# Altium PCB PCB_V0.PcbDoc (part 1 of 4)
Units mm, origin at the board's own origin, x right, y up, seen from the top; angles counter-clockwise.
Board outline 107.95 x 48.89 mm, 4 copper layers (Top Layer, Layer 1, Layer 2, Bottom Layer), stack 1.586 mm thick; 377 components, 276 nets, 880 pads, 284 vias.
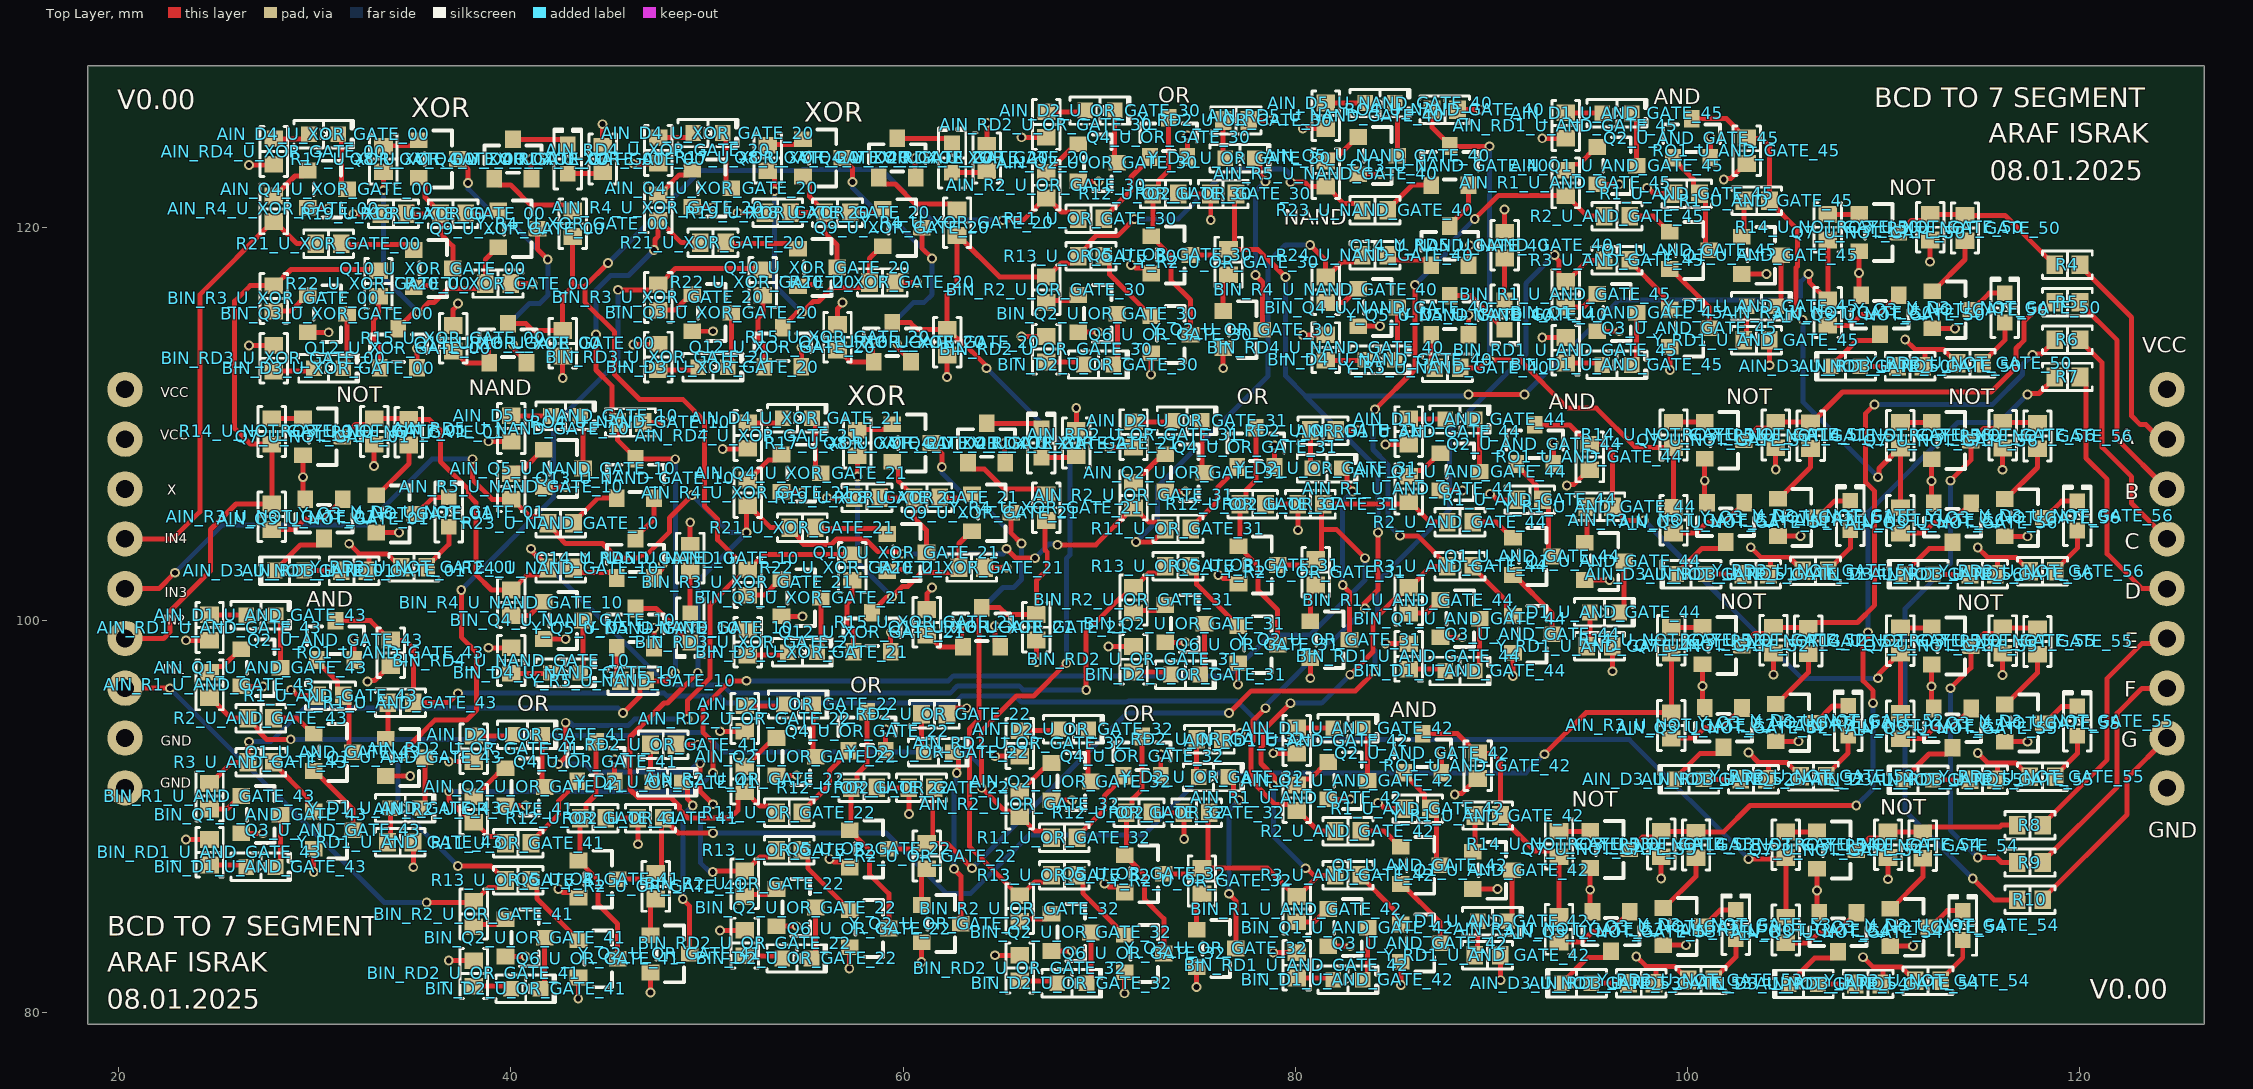
[diagram p0: Top Layer view]
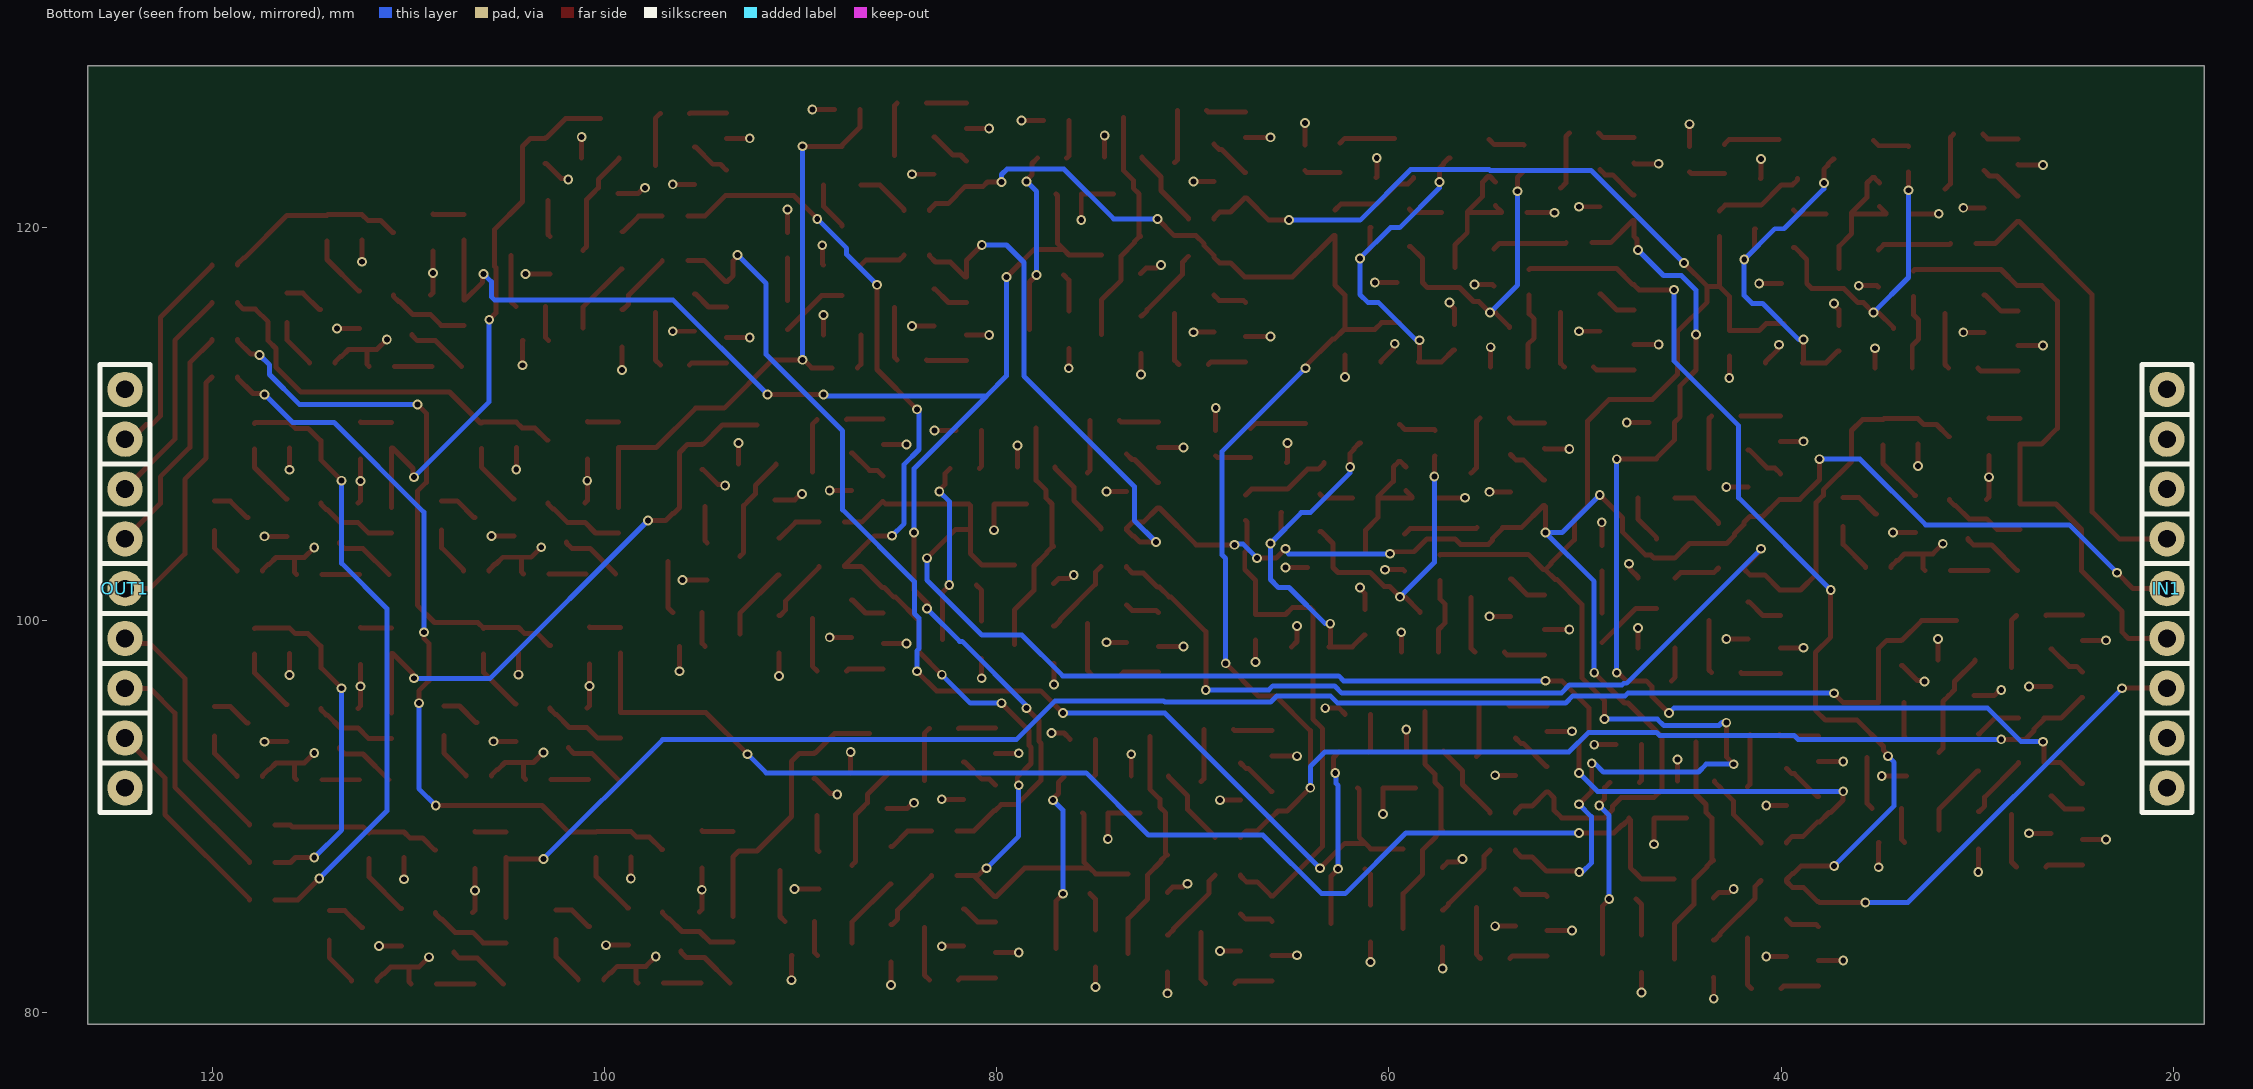
[diagram p1: Bottom Layer view, seen from below]
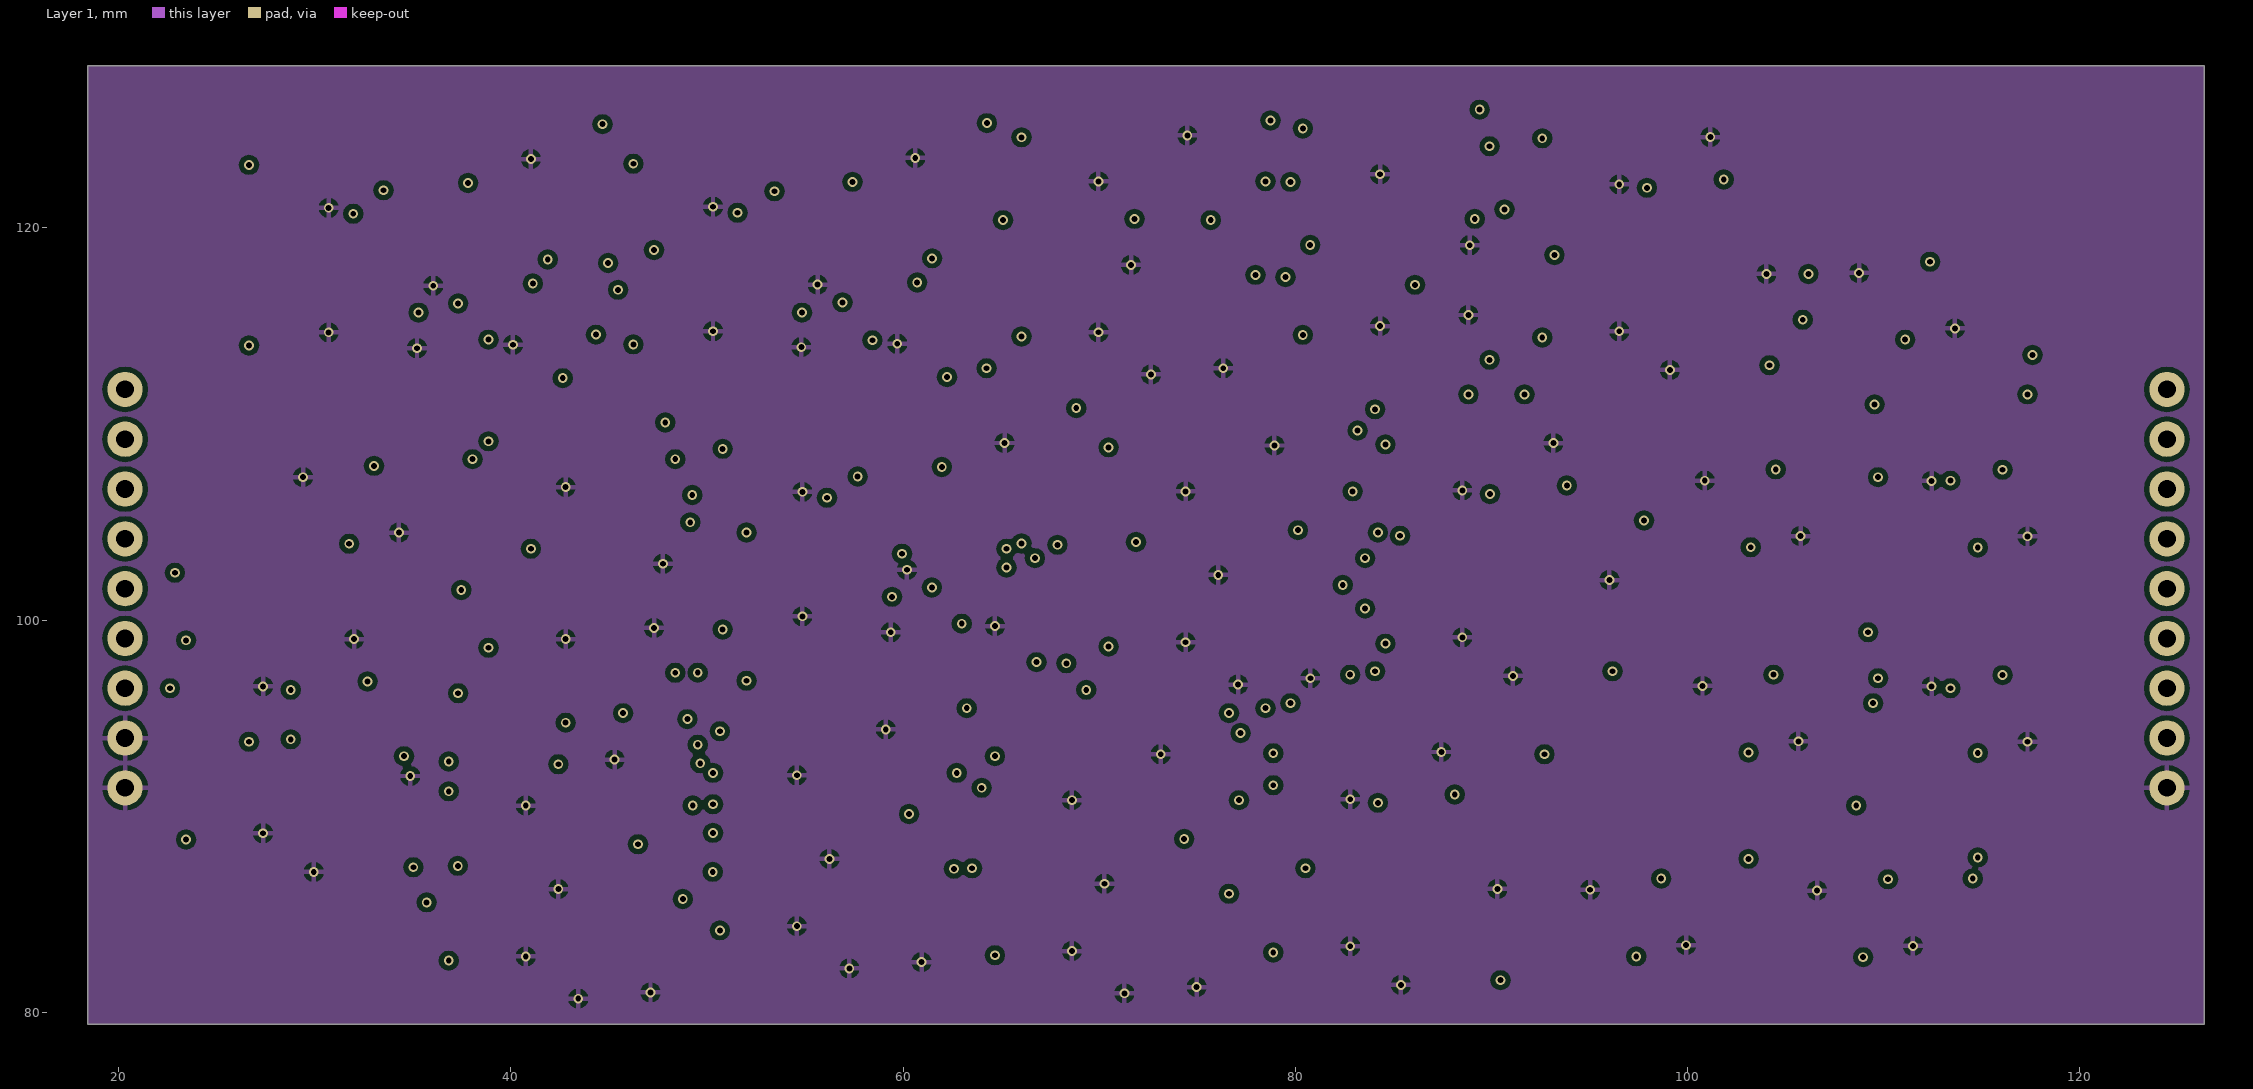
[diagram p2: Layer 1]
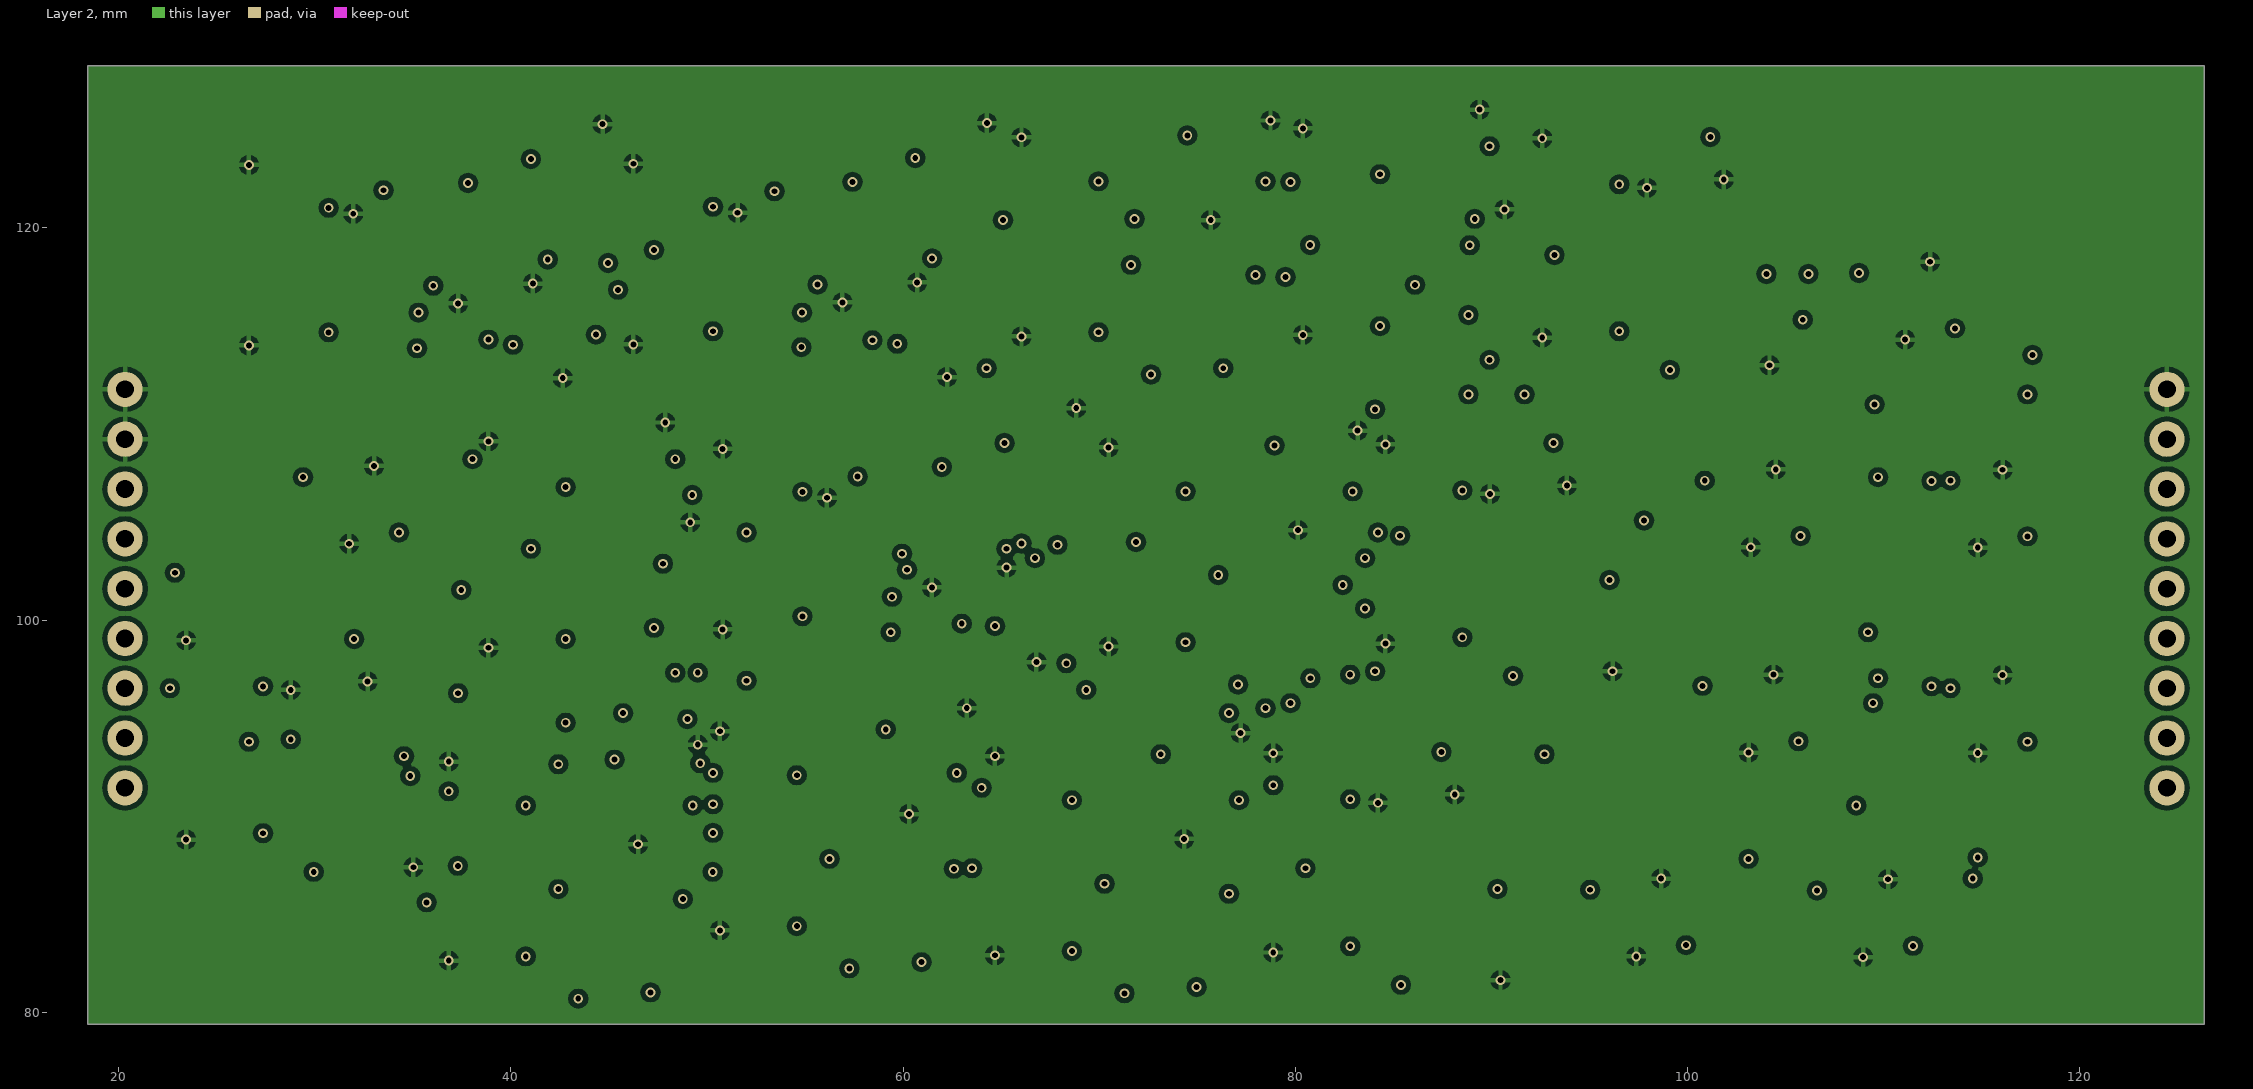
[diagram p3: Layer 2]
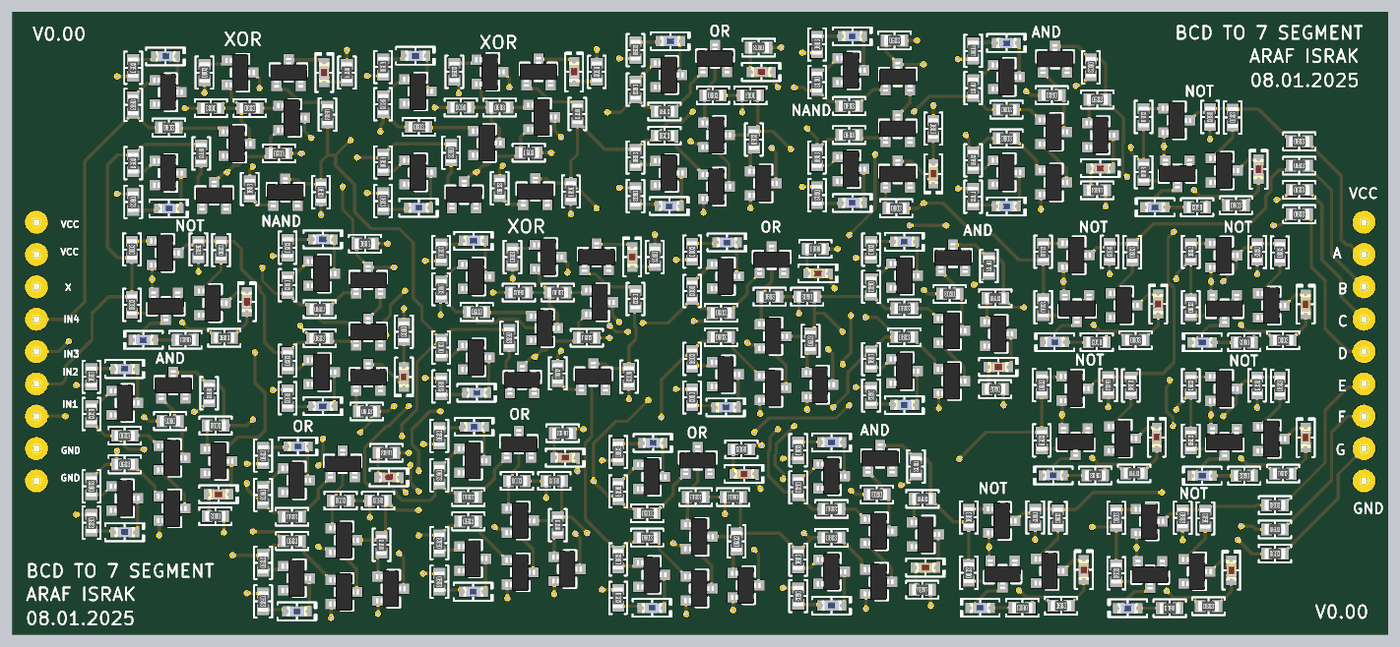
[diagram p7: 3D render of the assembled board from above, using the file's embedded part models]

## Layer stack, top to bottom
Top Solder: solder mask 0.0102, Solder Resist, Dk 3.5
Top Layer: signal copper 0.0356
Dielectric 2: prepreg 0.21, PP-006, Dk 4.1
Layer 1: signal copper 0.015
Dielectric 1: dielectric 1.065, FR-4, Dk 4.8
Layer 2: signal copper 0.015
Dielectric 3: prepreg 0.21, PP-006, Dk 4.1
Bottom Layer: signal copper 0.0356
Bottom Solder: solder mask 0.0102, Solder Resist, Dk 3.5

## Board outline
18.415,79.375 126.365,79.375 126.365,128.27 18.415,128.27

## Design rules (kind name [scope] priority, off if disabled: settings)
Clearance [All] p1: gap=0.254 ignorepadtopadclearanceinfootprint=FALSE except(0: Arc-Hole Track-Hole SMDPad-Hole THPad-Hole Via-Hole Fill-Hole Poly-Hole Region-Hole Text-Hole)
MinimumSolderMaskSliver [All] p1: minsoldermaskwidth=0.15
PolygonConnect [All] p1: connectstyle=Relief reliefconductorwidth=0.254 reliefentries=4 polygonreliefangle="90 Angle" airgapwidth=0.254
RoomDefinition U_XOR_GATE_21 [InComponentClass('U_XOR_GATE_21')] p1: confinementstyle=ConfineIn formatcopy=TRUE lockcomponents=FALSE outline 50.8,97.089 70.104,97.089 70.104,111.567 50.8,111.567
RoomDefinition U_XOR_GATE_20 [InComponentClass('U_XOR_GATE_20')] p2: confinementstyle=ConfineIn formatcopy=TRUE lockcomponents=FALSE outline 46.242,111.628 65.546,111.628 65.546,126.106 46.242,126.106
RoomDefinition U_XOR_GATE_00 [InComponentClass('U_XOR_GATE_00')] p3: confinementstyle=ConfineIn formatcopy=TRUE lockcomponents=FALSE outline 26.64,111.573 45.944,111.573 45.944,126.051 26.64,126.051
RoomDefinition U_OR_GATE_41 [InComponentClass('U_OR_GATE_41')] p4: confinementstyle=ConfineIn formatcopy=TRUE lockcomponents=FALSE outline 36.83,79.925 50.292,79.925 50.292,95.419 36.83,95.419
RoomDefinition U_OR_GATE_32 [InComponentClass('U_OR_GATE_32')] p5: confinementstyle=ConfineIn formatcopy=TRUE lockcomponents=FALSE outline 64.684,80.198 78.146,80.198 78.146,95.692 64.684,95.692
RoomDefinition U_OR_GATE_31 [InComponentClass('U_OR_GATE_31')] p6: confinementstyle=ConfineIn formatcopy=TRUE lockcomponents=FALSE outline 70.484,95.946 83.946,95.946 83.946,111.44 70.484,111.44
RoomDefinition U_OR_GATE_30 [InComponentClass('U_OR_GATE_30')] p7: confinementstyle=ConfineIn formatcopy=TRUE lockcomponents=FALSE outline 66.04,111.76 79.502,111.76 79.502,127.254 66.04,127.254
RoomDefinition U_OR_GATE_22 [InComponentClass('U_OR_GATE_22')] p8: confinementstyle=ConfineIn formatcopy=TRUE lockcomponents=FALSE outline 50.656,81.468 64.118,81.468 64.118,96.962 50.656,96.962
RoomDefinition U_NOT_GATE_56 [InComponentClass('U_NOT_GATE_56')] p9: confinementstyle=ConfineIn formatcopy=TRUE lockcomponents=FALSE outline 109.728,101.153 121.158,101.153 121.158,111.313 109.728,111.313
RoomDefinition U_NOT_GATE_55 [InComponentClass('U_NOT_GATE_55')] p10: confinementstyle=ConfineIn formatcopy=TRUE lockcomponents=FALSE outline 109.728,90.678 121.158,90.678 121.158,100.838 109.728,100.838
RoomDefinition U_NOT_GATE_54 [InComponentClass('U_NOT_GATE_54')] p11: confinementstyle=ConfineIn formatcopy=TRUE lockcomponents=FALSE outline 103.886,80.264 115.316,80.264 115.316,90.424 103.886,90.424
RoomDefinition U_NOT_GATE_53 [InComponentClass('U_NOT_GATE_53')] p12: confinementstyle=ConfineIn formatcopy=TRUE lockcomponents=FALSE outline 92.314,80.302 103.744,80.302 103.744,90.462 92.314,90.462
RoomDefinition U_NOT_GATE_52 [InComponentClass('U_NOT_GATE_52')] p13: confinementstyle=ConfineIn formatcopy=TRUE lockcomponents=FALSE outline 98.044,90.699 109.474,90.699 109.474,100.859 98.044,100.859
RoomDefinition U_NOT_GATE_51 [InComponentClass('U_NOT_GATE_51')] p14: confinementstyle=ConfineIn formatcopy=TRUE lockcomponents=FALSE outline 98.156,101.168 109.586,101.168 109.586,111.328 98.156,111.328
RoomDefinition U_NOT_GATE_50 [InComponentClass('U_NOT_GATE_50')] p15: confinementstyle=ConfineIn formatcopy=TRUE lockcomponents=FALSE outline 106.03,111.76 117.46,111.76 117.46,121.92 106.03,121.92
RoomDefinition U_NOT_GATE_01 [InComponentClass('U_NOT_GATE_01')] p16: confinementstyle=ConfineIn formatcopy=TRUE lockcomponents=FALSE outline 26.67,101.346 38.1,101.346 38.1,111.506 26.67,111.506
RoomDefinition U_NAND_GATE_40 [InComponentClass('U_NAND_GATE_40')] p17: confinementstyle=ConfineIn formatcopy=TRUE lockcomponents=FALSE outline 79.756,111.746 91.948,111.746 91.948,127.494 79.756,127.494
RoomDefinition U_NAND_GATE_10 [InComponentClass('U_NAND_GATE_10')] p18: confinementstyle=ConfineIn formatcopy=TRUE lockcomponents=FALSE outline 38.221,95.788 50.413,95.788 50.413,111.536 38.221,111.536
RoomDefinition U_AND_GATE_45 [InComponentClass('U_AND_GATE_45')] p19: confinementstyle=ConfineIn formatcopy=TRUE lockcomponents=FALSE outline 92.348,111.74 105.81,111.74 105.81,126.98 92.348,126.98
RoomDefinition U_AND_GATE_44 [InComponentClass('U_AND_GATE_44')] p20: confinementstyle=ConfineIn formatcopy=TRUE lockcomponents=FALSE outline 84.344,96.129 97.806,96.129 97.806,111.369 84.344,111.369
RoomDefinition U_AND_GATE_43 [InComponentClass('U_AND_GATE_43')] p21: confinementstyle=ConfineIn formatcopy=TRUE lockcomponents=FALSE outline 23.18,86.136 36.642,86.136 36.642,101.376 23.18,101.376
RoomDefinition U_AND_GATE_42 [InComponentClass('U_AND_GATE_42')] p22: confinementstyle=ConfineIn formatcopy=TRUE lockcomponents=FALSE outline 78.628,80.375 92.09,80.375 92.09,95.615 78.628,95.615
RoutingVias [All] p1: holewidth=0.3 width=0.5 viastyle="Through Hole" minholewidth=0.3 minwidth=0.5 maxholewidth=0.3 maxwidth=0.5
SilkToSilkClearance [All] p1: silktosilkclearance=0.05
SilkToSolderMaskClearance [IsPad] p1: minsilkscreentomaskgap=0.1 clearancetoexposedcopper=TRUE
SolderMaskExpansion [All] p1: expansion=0.05
Width [All] p1: maxlimit=0.254 minlimit=0.254 preferedwidth=0.254
27 further rules are at their usual default settings.

## Classes and differential pairs
channel class XOR_GATE: U_XOR_GATE_00 U_XOR_GATE_20 U_XOR_GATE_21
channel class OR_GATE: U_OR_GATE_22 U_OR_GATE_30 U_OR_GATE_31 U_OR_GATE_32 U_OR_GATE_41
channel class NOT_GATE: U_NOT_GATE_01 U_NOT_GATE_50 U_NOT_GATE_51 U_NOT_GATE_52 U_NOT_GATE_53 U_NOT_GATE_54 U_NOT_GATE_55 U_NOT_GATE_56
channel class NAND_GATE: U_NAND_GATE_10 U_NAND_GATE_40
channel class AND_GATE: U_AND_GATE_42 U_AND_GATE_43 U_AND_GATE_44 U_AND_GATE_45
component class U_XOR_GATE_21: AIN_D4_U_XOR_GATE_21 AIN_Q4_U_XOR_GATE_21 AIN_R4_U_XOR_GATE_21 AIN_RD4_U_XOR_GATE_21 BIN_D3_U_XOR_GATE_21 BIN_Q3_U_XOR_GATE_21 BIN_R3_U_XOR_GATE_21 BIN_RD3_U_XOR_GATE_21 Q8_U_XOR_GATE_21 Q9_U_XOR_GATE_21 Q10_U_XOR_GATE_21 Q11_U_XOR_GATE_21 Q12_U_XOR_GATE_21 R15_U_XOR_GATE_21 R16_U_XOR_GATE_21 R17_U_XOR_GATE_21 R18_U_XOR_GATE_21 R19_U_XOR_GATE_21 R20_U_XOR_GATE_21 R21_U_XOR_GATE_21 R22_U_XOR_GATE_21 Y_D4_U_XOR_GATE_21 Y_Q4_U_XOR_GATE_21 Y_R4_U_XOR_GATE_21 Y_RD4_U_XOR_GATE_21
component class U_XOR_GATE_20: AIN_D4_U_XOR_GATE_20 AIN_Q4_U_XOR_GATE_20 AIN_R4_U_XOR_GATE_20 AIN_RD4_U_XOR_GATE_20 BIN_D3_U_XOR_GATE_20 BIN_Q3_U_XOR_GATE_20 BIN_R3_U_XOR_GATE_20 BIN_RD3_U_XOR_GATE_20 Q8_U_XOR_GATE_20 Q9_U_XOR_GATE_20 Q10_U_XOR_GATE_20 Q11_U_XOR_GATE_20 Q12_U_XOR_GATE_20 R15_U_XOR_GATE_20 R16_U_XOR_GATE_20 R17_U_XOR_GATE_20 R18_U_XOR_GATE_20 R19_U_XOR_GATE_20 R20_U_XOR_GATE_20 R21_U_XOR_GATE_20 R22_U_XOR_GATE_20 Y_D4_U_XOR_GATE_20 Y_Q4_U_XOR_GATE_20 Y_R4_U_XOR_GATE_20 Y_RD4_U_XOR_GATE_20
component class U_XOR_GATE_00: AIN_D4_U_XOR_GATE_00 AIN_Q4_U_XOR_GATE_00 AIN_R4_U_XOR_GATE_00 AIN_RD4_U_XOR_GATE_00 BIN_D3_U_XOR_GATE_00 BIN_Q3_U_XOR_GATE_00 BIN_R3_U_XOR_GATE_00 BIN_RD3_U_XOR_GATE_00 Q8_U_XOR_GATE_00 Q9_U_XOR_GATE_00 Q10_U_XOR_GATE_00 Q11_U_XOR_GATE_00 Q12_U_XOR_GATE_00 R15_U_XOR_GATE_00 R16_U_XOR_GATE_00 R17_U_XOR_GATE_00 R18_U_XOR_GATE_00 R19_U_XOR_GATE_00 R20_U_XOR_GATE_00 R21_U_XOR_GATE_00 R22_U_XOR_GATE_00 Y_D4_U_XOR_GATE_00 Y_Q4_U_XOR_GATE_00 Y_R4_U_XOR_GATE_00 Y_RD4_U_XOR_GATE_00
component class U_OR_GATE_41: AIN_D2_U_OR_GATE_41 AIN_Q2_U_OR_GATE_41 AIN_R2_U_OR_GATE_41 AIN_RD2_U_OR_GATE_41 BIN_D2_U_OR_GATE_41 BIN_Q2_U_OR_GATE_41 BIN_R2_U_OR_GATE_41 BIN_RD2_U_OR_GATE_41 Q4_U_OR_GATE_41 Q5_U_OR_GATE_41 Q6_U_OR_GATE_41 R11_U_OR_GATE_41 R12_U_OR_GATE_41 R13_U_OR_GATE_41 RO2_U_OR_GATE_41 Y_D2_U_OR_GATE_41 Y_Q2_U_OR_GATE_41 Y_R2_U_OR_GATE_41 Y_RD2_U_OR_GATE_41
component class U_OR_GATE_32: AIN_D2_U_OR_GATE_32 AIN_Q2_U_OR_GATE_32 AIN_R2_U_OR_GATE_32 AIN_RD2_U_OR_GATE_32 BIN_D2_U_OR_GATE_32 BIN_Q2_U_OR_GATE_32 BIN_R2_U_OR_GATE_32 BIN_RD2_U_OR_GATE_32 Q4_U_OR_GATE_32 Q5_U_OR_GATE_32 Q6_U_OR_GATE_32 R11_U_OR_GATE_32 R12_U_OR_GATE_32 R13_U_OR_GATE_32 RO2_U_OR_GATE_32 Y_D2_U_OR_GATE_32 Y_Q2_U_OR_GATE_32 Y_R2_U_OR_GATE_32 Y_RD2_U_OR_GATE_32
component class U_OR_GATE_31: AIN_D2_U_OR_GATE_31 AIN_Q2_U_OR_GATE_31 AIN_R2_U_OR_GATE_31 AIN_RD2_U_OR_GATE_31 BIN_D2_U_OR_GATE_31 BIN_Q2_U_OR_GATE_31 BIN_R2_U_OR_GATE_31 BIN_RD2_U_OR_GATE_31 Q4_U_OR_GATE_31 Q5_U_OR_GATE_31 Q6_U_OR_GATE_31 R11_U_OR_GATE_31 R12_U_OR_GATE_31 R13_U_OR_GATE_31 RO2_U_OR_GATE_31 Y_D2_U_OR_GATE_31 Y_Q2_U_OR_GATE_31 Y_R2_U_OR_GATE_31 Y_RD2_U_OR_GATE_31
component class U_OR_GATE_30: AIN_D2_U_OR_GATE_30 AIN_Q2_U_OR_GATE_30 AIN_R2_U_OR_GATE_30 AIN_RD2_U_OR_GATE_30 BIN_D2_U_OR_GATE_30 BIN_Q2_U_OR_GATE_30 BIN_R2_U_OR_GATE_30 BIN_RD2_U_OR_GATE_30 Q4_U_OR_GATE_30 Q5_U_OR_GATE_30 Q6_U_OR_GATE_30 R11_U_OR_GATE_30 R12_U_OR_GATE_30 R13_U_OR_GATE_30 RO2_U_OR_GATE_30 Y_D2_U_OR_GATE_30 Y_Q2_U_OR_GATE_30 Y_R2_U_OR_GATE_30 Y_RD2_U_OR_GATE_30
component class U_OR_GATE_22: AIN_D2_U_OR_GATE_22 AIN_Q2_U_OR_GATE_22 AIN_R2_U_OR_GATE_22 AIN_RD2_U_OR_GATE_22 BIN_D2_U_OR_GATE_22 BIN_Q2_U_OR_GATE_22 BIN_R2_U_OR_GATE_22 BIN_RD2_U_OR_GATE_22 Q4_U_OR_GATE_22 Q5_U_OR_GATE_22 Q6_U_OR_GATE_22 R11_U_OR_GATE_22 R12_U_OR_GATE_22 R13_U_OR_GATE_22 RO2_U_OR_GATE_22 Y_D2_U_OR_GATE_22 Y_Q2_U_OR_GATE_22 Y_R2_U_OR_GATE_22 Y_RD2_U_OR_GATE_22
component class U_NOT_GATE_56: AIN_D3_U_NOT_GATE_56 AIN_Q3_U_NOT_GATE_56 AIN_R3_U_NOT_GATE_56 AIN_RD3_U_NOT_GATE_56 Q7_U_NOT_GATE_56 R14_U_NOT_GATE_56 RO3_U_NOT_GATE_56 Y_D3_U_NOT_GATE_56 Y_Q3_U_NOT_GATE_56 Y_R3_U_NOT_GATE_56 Y_RD3_U_NOT_GATE_56
component class U_NOT_GATE_55: AIN_D3_U_NOT_GATE_55 AIN_Q3_U_NOT_GATE_55 AIN_R3_U_NOT_GATE_55 AIN_RD3_U_NOT_GATE_55 Q7_U_NOT_GATE_55 R14_U_NOT_GATE_55 RO3_U_NOT_GATE_55 Y_D3_U_NOT_GATE_55 Y_Q3_U_NOT_GATE_55 Y_R3_U_NOT_GATE_55 Y_RD3_U_NOT_GATE_55
component class U_NOT_GATE_54: AIN_D3_U_NOT_GATE_54 AIN_Q3_U_NOT_GATE_54 AIN_R3_U_NOT_GATE_54 AIN_RD3_U_NOT_GATE_54 Q7_U_NOT_GATE_54 R14_U_NOT_GATE_54 RO3_U_NOT_GATE_54 Y_D3_U_NOT_GATE_54 Y_Q3_U_NOT_GATE_54 Y_R3_U_NOT_GATE_54 Y_RD3_U_NOT_GATE_54
component class U_NOT_GATE_53: AIN_D3_U_NOT_GATE_53 AIN_Q3_U_NOT_GATE_53 AIN_R3_U_NOT_GATE_53 AIN_RD3_U_NOT_GATE_53 Q7_U_NOT_GATE_53 R14_U_NOT_GATE_53 RO3_U_NOT_GATE_53 Y_D3_U_NOT_GATE_53 Y_Q3_U_NOT_GATE_53 Y_R3_U_NOT_GATE_53 Y_RD3_U_NOT_GATE_53
component class U_NOT_GATE_52: AIN_D3_U_NOT_GATE_52 AIN_Q3_U_NOT_GATE_52 AIN_R3_U_NOT_GATE_52 AIN_RD3_U_NOT_GATE_52 Q7_U_NOT_GATE_52 R14_U_NOT_GATE_52 RO3_U_NOT_GATE_52 Y_D3_U_NOT_GATE_52 Y_Q3_U_NOT_GATE_52 Y_R3_U_NOT_GATE_52 Y_RD3_U_NOT_GATE_52
component class U_NOT_GATE_51: AIN_D3_U_NOT_GATE_51 AIN_Q3_U_NOT_GATE_51 AIN_R3_U_NOT_GATE_51 AIN_RD3_U_NOT_GATE_51 Q7_U_NOT_GATE_51 R14_U_NOT_GATE_51 RO3_U_NOT_GATE_51 Y_D3_U_NOT_GATE_51 Y_Q3_U_NOT_GATE_51 Y_R3_U_NOT_GATE_51 Y_RD3_U_NOT_GATE_51
component class U_NOT_GATE_50: AIN_D3_U_NOT_GATE_50 AIN_Q3_U_NOT_GATE_50 AIN_R3_U_NOT_GATE_50 AIN_RD3_U_NOT_GATE_50 Q7_U_NOT_GATE_50 R14_U_NOT_GATE_50 RO3_U_NOT_GATE_50 Y_D3_U_NOT_GATE_50 Y_Q3_U_NOT_GATE_50 Y_R3_U_NOT_GATE_50 Y_RD3_U_NOT_GATE_50
component class U_NOT_GATE_01: AIN_D3_U_NOT_GATE_01 AIN_Q3_U_NOT_GATE_01 AIN_R3_U_NOT_GATE_01 AIN_RD3_U_NOT_GATE_01 Q7_U_NOT_GATE_01 R14_U_NOT_GATE_01 RO3_U_NOT_GATE_01 Y_D3_U_NOT_GATE_01 Y_Q3_U_NOT_GATE_01 Y_R3_U_NOT_GATE_01 Y_RD3_U_NOT_GATE_01
component class U_NAND_GATE_40: AIN_D5_U_NAND_GATE_40 AIN_Q5_U_NAND_GATE_40 AIN_R5_U_NAND_GATE_40 AIN_RD5_U_NAND_GATE_40 BIN_D4_U_NAND_GATE_40 BIN_Q4_U_NAND_GATE_40 BIN_R4_U_NAND_GATE_40 BIN_RD4_U_NAND_GATE_40 Q13_U_NAND_GATE_40 Q14_U_NAND_GATE_40 R23_U_NAND_GATE_40 R24_U_NAND_GATE_40 RO4_U_NAND_GATE_40 Y_D5_U_NAND_GATE_40 Y_Q5_U_NAND_GATE_40 Y_R5_U_NAND_GATE_40 Y_RD5_U_NAND_GATE_40
component class U_NAND_GATE_10: AIN_D5_U_NAND_GATE_10 AIN_Q5_U_NAND_GATE_10 AIN_R5_U_NAND_GATE_10 AIN_RD5_U_NAND_GATE_10 BIN_D4_U_NAND_GATE_10 BIN_Q4_U_NAND_GATE_10 BIN_R4_U_NAND_GATE_10 BIN_RD4_U_NAND_GATE_10 Q13_U_NAND_GATE_10 Q14_U_NAND_GATE_10 R23_U_NAND_GATE_10 R24_U_NAND_GATE_10 RO4_U_NAND_GATE_10 Y_D5_U_NAND_GATE_10 Y_Q5_U_NAND_GATE_10 Y_R5_U_NAND_GATE_10 Y_RD5_U_NAND_GATE_10
component class U_AND_GATE_45: AIN_D1_U_AND_GATE_45 AIN_Q1_U_AND_GATE_45 AIN_R1_U_AND_GATE_45 AIN_RD1_U_AND_GATE_45 BIN_D1_U_AND_GATE_45 BIN_Q1_U_AND_GATE_45 BIN_R1_U_AND_GATE_45 BIN_RD1_U_AND_GATE_45 Q1_U_AND_GATE_45 Q2_U_AND_GATE_45 Q3_U_AND_GATE_45 R1_U_AND_GATE_45 R2_U_AND_GATE_45 R3_U_AND_GATE_45 RO1_U_AND_GATE_45 Y_D1_U_AND_GATE_45 Y_Q1_U_AND_GATE_45 Y_R1_U_AND_GATE_45 Y_RD1_U_AND_GATE_45
component class U_AND_GATE_44: AIN_D1_U_AND_GATE_44 AIN_Q1_U_AND_GATE_44 AIN_R1_U_AND_GATE_44 AIN_RD1_U_AND_GATE_44 BIN_D1_U_AND_GATE_44 BIN_Q1_U_AND_GATE_44 BIN_R1_U_AND_GATE_44 BIN_RD1_U_AND_GATE_44 Q1_U_AND_GATE_44 Q2_U_AND_GATE_44 Q3_U_AND_GATE_44 R1_U_AND_GATE_44 R2_U_AND_GATE_44 R3_U_AND_GATE_44 RO1_U_AND_GATE_44 Y_D1_U_AND_GATE_44 Y_Q1_U_AND_GATE_44 Y_R1_U_AND_GATE_44 Y_RD1_U_AND_GATE_44
component class U_AND_GATE_43: AIN_D1_U_AND_GATE_43 AIN_Q1_U_AND_GATE_43 AIN_R1_U_AND_GATE_43 AIN_RD1_U_AND_GATE_43 BIN_D1_U_AND_GATE_43 BIN_Q1_U_AND_GATE_43 BIN_R1_U_AND_GATE_43 BIN_RD1_U_AND_GATE_43 Q1_U_AND_GATE_43 Q2_U_AND_GATE_43 Q3_U_AND_GATE_43 R1_U_AND_GATE_43 R2_U_AND_GATE_43 R3_U_AND_GATE_43 RO1_U_AND_GATE_43 Y_D1_U_AND_GATE_43 Y_Q1_U_AND_GATE_43 Y_R1_U_AND_GATE_43 Y_RD1_U_AND_GATE_43
component class U_AND_GATE_42: AIN_D1_U_AND_GATE_42 AIN_Q1_U_AND_GATE_42 AIN_R1_U_AND_GATE_42 AIN_RD1_U_AND_GATE_42 BIN_D1_U_AND_GATE_42 BIN_Q1_U_AND_GATE_42 BIN_R1_U_AND_GATE_42 BIN_RD1_U_AND_GATE_42 Q1_U_AND_GATE_42 Q2_U_AND_GATE_42 Q3_U_AND_GATE_42 R1_U_AND_GATE_42 R2_U_AND_GATE_42 R3_U_AND_GATE_42 RO1_U_AND_GATE_42 Y_D1_U_AND_GATE_42 Y_Q1_U_AND_GATE_42 Y_R1_U_AND_GATE_42 Y_RD1_U_AND_GATE_42
component class MODULE_1: IN1 OUT1 R4 R5 R6 R7 R8 R9 R10

## Components (designator, comment, footprint, x,y, rotation, side; value= is the part's Value field where it differs from the comment)
AIN_D1_U_AND_GATE_42 "Blue" "LED 0603_1608 BLUE" 82.692,94.472 r0 top (schematic designator AIN_D1)
AIN_D1_U_AND_GATE_43 "Blue" "LED 0603_1608 BLUE" 27.244,100.233 r0 top (schematic designator AIN_D1)
AIN_D1_U_AND_GATE_44 "Blue" "LED 0603_1608 BLUE" 88.408,110.226 r0 top (schematic designator AIN_D1)
AIN_D1_U_AND_GATE_45 "Blue" "LED 0603_1608 BLUE" 96.412,125.837 r0 top (schematic designator AIN_D1)
AIN_D2_U_OR_GATE_22 "Blue" "LED 0603_1608 BLUE" 54.661,95.692 r0 top (schematic designator AIN_D2)
AIN_D2_U_OR_GATE_30 "Blue" "LED 0603_1608 BLUE" 70.045,125.984 r0 top (schematic designator AIN_D2)
AIN_D2_U_OR_GATE_31 "Blue" "LED 0603_1608 BLUE" 74.489,110.17 r0 top (schematic designator AIN_D2)
AIN_D2_U_OR_GATE_32 "Blue" "LED 0603_1608 BLUE" 68.689,94.422 r0 top (schematic designator AIN_D2)
AIN_D2_U_OR_GATE_41 "Blue" "LED 0603_1608 BLUE" 40.835,94.149 r0 top (schematic designator AIN_D2)
AIN_D3_U_NOT_GATE_01 "Blue" "LED 0603_1608 BLUE" 28.702,102.52 r180 top (schematic designator AIN_D3)
AIN_D3_U_NOT_GATE_50 "Blue" "LED 0603_1608 BLUE" 108.062,112.934 r180 top (schematic designator AIN_D3)
AIN_D3_U_NOT_GATE_51 "Blue" "LED 0603_1608 BLUE" 100.188,102.342 r180 top (schematic designator AIN_D3)
AIN_D3_U_NOT_GATE_52 "Blue" "LED 0603_1608 BLUE" 100.076,91.873 r180 top (schematic designator AIN_D3)
AIN_D3_U_NOT_GATE_53 "Blue" "LED 0603_1608 BLUE" 94.346,81.476 r180 top (schematic designator AIN_D3)
AIN_D3_U_NOT_GATE_54 "Blue" "LED 0603_1608 BLUE" 105.918,81.438 r180 top (schematic designator AIN_D3)
AIN_D3_U_NOT_GATE_55 "Blue" "LED 0603_1608 BLUE" 111.76,91.852 r180 top (schematic designator AIN_D3)
AIN_D3_U_NOT_GATE_56 "Blue" "LED 0603_1608 BLUE" 111.76,102.327 r180 top (schematic designator AIN_D3)
AIN_D4_U_XOR_GATE_00 "Blue" "LED 0603_1608 BLUE" 30.45,124.781 r0 top (schematic designator AIN_D4)
AIN_D4_U_XOR_GATE_20 "Blue" "LED 0603_1608 BLUE" 50.052,124.836 r0 top (schematic designator AIN_D4)
AIN_D4_U_XOR_GATE_21 "Blue" "LED 0603_1608 BLUE" 54.61,110.297 r0 top (schematic designator AIN_D4)
AIN_D5_U_NAND_GATE_10 "Blue" "LED 0603_1608 BLUE" 42.793,110.408 r0 top (schematic designator AIN_D5)
AIN_D5_U_NAND_GATE_40 "Blue" "LED 0603_1608 BLUE" 84.328,126.366 r0 top (schematic designator AIN_D5)
AIN_Q1_U_AND_GATE_42 "#NAME?" "MCCSEMI SOT-23-3" 82.692,91.805 r0 top (schematic designator AIN_Q1)
AIN_Q1_U_AND_GATE_43 "#NAME?" "MCCSEMI SOT-23-3" 27.244,97.566 r0 top (schematic designator AIN_Q1)
AIN_Q1_U_AND_GATE_44 "#NAME?" "MCCSEMI SOT-23-3" 88.408,107.559 r0 top (schematic designator AIN_Q1)
AIN_Q1_U_AND_GATE_45 "#NAME?" "MCCSEMI SOT-23-3" 96.412,123.17 r0 top (schematic designator AIN_Q1)
AIN_Q2_U_OR_GATE_22 "#NAME?" "MCCSEMI SOT-23-3" 54.546,93.03 r0 top (schematic designator AIN_Q2)
AIN_Q2_U_OR_GATE_30 "#NAME?" "MCCSEMI SOT-23-3" 69.93,123.322 r0 top (schematic designator AIN_Q2)
AIN_Q2_U_OR_GATE_31 "#NAME?" "MCCSEMI SOT-23-3" 74.374,107.508 r0 top (schematic designator AIN_Q2)
AIN_Q2_U_OR_GATE_32 "#NAME?" "MCCSEMI SOT-23-3" 68.574,91.76 r0 top (schematic designator AIN_Q2)
AIN_Q2_U_OR_GATE_41 "#NAME?" "MCCSEMI SOT-23-3" 40.72,91.487 r0 top (schematic designator AIN_Q2)
AIN_Q3_U_NOT_GATE_01 "#NAME?" "MCCSEMI SOT-23-3" 30.465,105.156 r270 top (schematic designator AIN_Q3)
AIN_Q3_U_NOT_GATE_50 "#NAME?" "MCCSEMI SOT-23-3" 109.825,115.57 r270 top (schematic designator AIN_Q3)
AIN_Q3_U_NOT_GATE_51 "#NAME?" "MCCSEMI SOT-23-3" 101.951,104.978 r270 top (schematic designator AIN_Q3)
AIN_Q3_U_NOT_GATE_52 "#NAME?" "MCCSEMI SOT-23-3" 101.839,94.509 r270 top (schematic designator AIN_Q3)
AIN_Q3_U_NOT_GATE_53 "#NAME?" "MCCSEMI SOT-23-3" 96.109,84.112 r270 top (schematic designator AIN_Q3)
AIN_Q3_U_NOT_GATE_54 "#NAME?" "MCCSEMI SOT-23-3" 107.681,84.074 r270 top (schematic designator AIN_Q3)
AIN_Q3_U_NOT_GATE_55 "#NAME?" "MCCSEMI SOT-23-3" 113.523,94.488 r270 top (schematic designator AIN_Q3)
AIN_Q3_U_NOT_GATE_56 "#NAME?" "MCCSEMI SOT-23-3" 113.523,104.963 r270 top (schematic designator AIN_Q3)
AIN_Q4_U_XOR_GATE_00 "#NAME?" "MCCSEMI SOT-23-3" 30.643,121.972 r0 top (schematic designator AIN_Q4)
AIN_Q4_U_XOR_GATE_20 "#NAME?" "MCCSEMI SOT-23-3" 50.245,122.027 r0 top (schematic designator AIN_Q4)
AIN_Q4_U_XOR_GATE_21 "#NAME?" "MCCSEMI SOT-23-3" 54.803,107.488 r0 top (schematic designator AIN_Q4)
AIN_Q5_U_NAND_GATE_10 "#NAME?" "MCCSEMI SOT-23-3" 42.678,107.726 r0 top (schematic designator AIN_Q5)
AIN_Q5_U_NAND_GATE_40 "#NAME?" "MCCSEMI SOT-23-3" 84.213,123.684 r0 top (schematic designator AIN_Q5)
AIN_R1_U_AND_GATE_42 "1 kOhms" "RES 0603_1608" 80.075,90.931 r270 top (schematic designator AIN_R1)
AIN_R1_U_AND_GATE_43 "1 kOhms" "RES 0603_1608" 24.627,96.692 r270 top (schematic designator AIN_R1)
AIN_R1_U_AND_GATE_44 "1 kOhms" "RES 0603_1608" 85.791,106.685 r270 top (schematic designator AIN_R1)
AIN_R1_U_AND_GATE_45 "1 kOhms" "RES 0603_1608" 93.795,122.296 r270 top (schematic designator AIN_R1)
AIN_R2_U_OR_GATE_22 "1 kOhms" "RES 0603_1608" 51.926,91.882 r270 top (schematic designator AIN_R2)
AIN_R2_U_OR_GATE_30 "1 kOhms" "RES 0603_1608" 67.31,122.174 r270 top (schematic designator AIN_R2)
AIN_R2_U_OR_GATE_31 "1 kOhms" "RES 0603_1608" 71.754,106.36 r270 top (schematic designator AIN_R2)
AIN_R2_U_OR_GATE_32 "1 kOhms" "RES 0603_1608" 65.954,90.612 r270 top (schematic designator AIN_R2)
AIN_R2_U_OR_GATE_41 "1 kOhms" "RES 0603_1608" 38.1,90.339 r270 top (schematic designator AIN_R2)
AIN_R3_U_NOT_GATE_01 "1 kOhms" "RES 0603_1608" 27.81,105.268 r90 top (schematic designator AIN_R3)
AIN_R3_U_NOT_GATE_50 "1 kOhms" "RES 0603_1608" 107.17,115.682 r90 top (schematic designator AIN_R3)
AIN_R3_U_NOT_GATE_51 "1 kOhms" "RES 0603_1608" 99.296,105.09 r90 top (schematic designator AIN_R3)
AIN_R3_U_NOT_GATE_52 "1 kOhms" "RES 0603_1608" 99.184,94.621 r90 top (schematic designator AIN_R3)
AIN_R3_U_NOT_GATE_53 "1 kOhms" "RES 0603_1608" 93.454,84.224 r90 top (schematic designator AIN_R3)
AIN_R3_U_NOT_GATE_54 "1 kOhms" "RES 0603_1608" 105.026,84.186 r90 top (schematic designator AIN_R3)
AIN_R3_U_NOT_GATE_55 "1 kOhms" "RES 0603_1608" 110.868,94.6 r90 top (schematic designator AIN_R3)
AIN_R3_U_NOT_GATE_56 "1 kOhms" "RES 0603_1608" 110.868,105.075 r90 top (schematic designator AIN_R3)
AIN_R4_U_XOR_GATE_00 "1 kOhms" "RES 0603_1608" 27.91,120.971 r270 top (schematic designator AIN_R4)
AIN_R4_U_XOR_GATE_20 "1 kOhms" "RES 0603_1608" 47.512,121.026 r270 top (schematic designator AIN_R4)
AIN_R4_U_XOR_GATE_21 "1 kOhms" "RES 0603_1608" 52.07,106.487 r270 top (schematic designator AIN_R4)
AIN_R5_U_NAND_GATE_10 "1 kOhms" "RES 0603_1608" 40.02,106.806 r270 top (schematic designator AIN_R5)
AIN_R5_U_NAND_GATE_40 "1 kOhms" "RES 0603_1608" 81.555,122.764 r270 top (schematic designator AIN_R5)
AIN_RD1_U_AND_GATE_42 "330 Ohms" "RES 0603_1608" 80.075,93.852 r90 top (schematic designator AIN_RD1)
AIN_RD1_U_AND_GATE_43 "330 Ohms" "RES 0603_1608" 24.627,99.613 r90 top (schematic designator AIN_RD1)
AIN_RD1_U_AND_GATE_44 "330 Ohms" "RES 0603_1608" 85.791,109.606 r90 top (schematic designator AIN_RD1)
AIN_RD1_U_AND_GATE_45 "330 Ohms" "RES 0603_1608" 93.795,125.217 r90 top (schematic designator AIN_RD1)
AIN_RD2_U_OR_GATE_22 "330 Ohms" "RES 0603_1608" 51.926,94.975 r90 top (schematic designator AIN_RD2)
AIN_RD2_U_OR_GATE_30 "330 Ohms" "RES 0603_1608" 67.31,125.267 r90 top (schematic designator AIN_RD2)
AIN_RD2_U_OR_GATE_31 "330 Ohms" "RES 0603_1608" 71.754,109.453 r90 top (schematic designator AIN_RD2)
AIN_RD2_U_OR_GATE_32 "330 Ohms" "RES 0603_1608" 65.954,93.705 r90 top (schematic designator AIN_RD2)
AIN_RD2_U_OR_GATE_41 "330 Ohms" "RES 0603_1608" 38.1,93.432 r90 top (schematic designator AIN_RD2)
AIN_RD3_U_NOT_GATE_01 "330 Ohms" "RES 0603_1608" 32.004,102.52 r180 top (schematic designator AIN_RD3)
AIN_RD3_U_NOT_GATE_50 "330 Ohms" "RES 0603_1608" 111.364,112.934 r180 top (schematic designator AIN_RD3)
AIN_RD3_U_NOT_GATE_51 "330 Ohms" "RES 0603_1608" 103.49,102.342 r180 top (schematic designator AIN_RD3)
AIN_RD3_U_NOT_GATE_52 "330 Ohms" "RES 0603_1608" 103.378,91.873 r180 top (schematic designator AIN_RD3)
AIN_RD3_U_NOT_GATE_53 "330 Ohms" "RES 0603_1608" 97.648,81.476 r180 top (schematic designator AIN_RD3)
AIN_RD3_U_NOT_GATE_54 "330 Ohms" "RES 0603_1608" 109.22,81.438 r180 top (schematic designator AIN_RD3)
AIN_RD3_U_NOT_GATE_55 "330 Ohms" "RES 0603_1608" 115.062,91.852 r180 top (schematic designator AIN_RD3)
AIN_RD3_U_NOT_GATE_56 "330 Ohms" "RES 0603_1608" 115.062,102.327 r180 top (schematic designator AIN_RD3)
AIN_RD4_U_XOR_GATE_00 "330 Ohms" "RES 0603_1608" 27.91,123.892 r90 top (schematic designator AIN_RD4)
AIN_RD4_U_XOR_GATE_20 "330 Ohms" "RES 0603_1608" 47.512,123.947 r90 top (schematic designator AIN_RD4)
AIN_RD4_U_XOR_GATE_21 "330 Ohms" "RES 0603_1608" 52.07,109.408 r90 top (schematic designator AIN_RD4)
AIN_RD5_U_NAND_GATE_10 "330 Ohms" "RES 0603_1608" 40.02,109.762 r90 top (schematic designator AIN_RD5)
AIN_RD5_U_NAND_GATE_40 "330 Ohms" "RES 0603_1608" 81.555,125.72 r90 top (schematic designator AIN_RD5)
BIN_D1_U_AND_GATE_42 "Blue" "LED 0603_1608 BLUE" 82.692,81.645 r0 top (schematic designator BIN_D1)
BIN_D1_U_AND_GATE_43 "Blue" "LED 0603_1608 BLUE" 27.244,87.406 r0 top (schematic designator BIN_D1)
BIN_D1_U_AND_GATE_44 "Blue" "LED 0603_1608 BLUE" 88.408,97.399 r0 top (schematic designator BIN_D1)
BIN_D1_U_AND_GATE_45 "Blue" "LED 0603_1608 BLUE" 96.412,113.01 r0 top (schematic designator BIN_D1)
BIN_D2_U_OR_GATE_22 "Blue" "LED 0603_1608 BLUE" 54.581,82.738 r0 top (schematic designator BIN_D2)
BIN_D2_U_OR_GATE_30 "Blue" "LED 0603_1608 BLUE" 69.965,113.03 r0 top (schematic designator BIN_D2)
BIN_D2_U_OR_GATE_31 "Blue" "LED 0603_1608 BLUE" 74.409,97.216 r0 top (schematic designator BIN_D2)
BIN_D2_U_OR_GATE_32 "Blue" "LED 0603_1608 BLUE" 68.609,81.468 r0 top (schematic designator BIN_D2)
BIN_D2_U_OR_GATE_41 "Blue" "LED 0603_1608 BLUE" 40.755,81.195 r0 top (schematic designator BIN_D2)
BIN_D3_U_XOR_GATE_00 "Blue" "LED 0603_1608 BLUE" 30.704,112.843 r0 top (schematic designator BIN_D3)
BIN_D3_U_XOR_GATE_20 "Blue" "LED 0603_1608 BLUE" 50.306,112.898 r0 top (schematic designator BIN_D3)
BIN_D3_U_XOR_GATE_21 "Blue" "LED 0603_1608 BLUE" 54.864,98.359 r0 top (schematic designator BIN_D3)
BIN_D4_U_NAND_GATE_10 "Blue" "LED 0603_1608 BLUE" 42.793,97.312 r0 top (schematic designator BIN_D4)
BIN_D4_U_NAND_GATE_40 "Blue" "LED 0603_1608 BLUE" 84.328,113.27 r0 top (schematic designator BIN_D4)
BIN_Q1_U_AND_GATE_42 "#NAME?" "MCCSEMI SOT-23-3" 82.692,84.312 r0 top (schematic designator BIN_Q1)
BIN_Q1_U_AND_GATE_43 "#NAME?" "MCCSEMI SOT-23-3" 27.244,90.073 r0 top (schematic designator BIN_Q1)
BIN_Q1_U_AND_GATE_44 "#NAME?" "MCCSEMI SOT-23-3" 88.408,100.066 r0 top (schematic designator BIN_Q1)
BIN_Q1_U_AND_GATE_45 "#NAME?" "MCCSEMI SOT-23-3" 96.412,115.677 r0 top (schematic designator BIN_Q1)
BIN_Q2_U_OR_GATE_22 "#NAME?" "MCCSEMI SOT-23-3" 54.546,85.335 r0 top (schematic designator BIN_Q2)
BIN_Q2_U_OR_GATE_30 "#NAME?" "MCCSEMI SOT-23-3" 69.93,115.627 r0 top (schematic designator BIN_Q2)
BIN_Q2_U_OR_GATE_31 "#NAME?" "MCCSEMI SOT-23-3" 74.374,99.813 r0 top (schematic designator BIN_Q2)
BIN_Q2_U_OR_GATE_32 "#NAME?" "MCCSEMI SOT-23-3" 68.574,84.065 r0 top (schematic designator BIN_Q2)
BIN_Q2_U_OR_GATE_41 "#NAME?" "MCCSEMI SOT-23-3" 40.72,83.792 r0 top (schematic designator BIN_Q2)
BIN_Q3_U_XOR_GATE_00 "#NAME?" "MCCSEMI SOT-23-3" 30.643,115.622 r0 top (schematic designator BIN_Q3)
BIN_Q3_U_XOR_GATE_20 "#NAME?" "MCCSEMI SOT-23-3" 50.245,115.677 r0 top (schematic designator BIN_Q3)
BIN_Q3_U_XOR_GATE_21 "#NAME?" "MCCSEMI SOT-23-3" 54.803,101.138 r0 top (schematic designator BIN_Q3)
BIN_Q4_U_NAND_GATE_10 "#NAME?" "MCCSEMI SOT-23-3" 42.678,99.979 r0 top (schematic designator BIN_Q4)
BIN_Q4_U_NAND_GATE_40 "#NAME?" "MCCSEMI SOT-23-3" 84.213,115.937 r0 top (schematic designator BIN_Q4)
BIN_R1_U_AND_GATE_42 "1 kOhms" "RES 0603_1608" 80.075,85.252 r90 top (schematic designator BIN_R1)
BIN_R1_U_AND_GATE_43 "1 kOhms" "RES 0603_1608" 24.627,91.013 r90 top (schematic designator BIN_R1)
BIN_R1_U_AND_GATE_44 "1 kOhms" "RES 0603_1608" 85.791,101.006 r90 top (schematic designator BIN_R1)
BIN_R1_U_AND_GATE_45 "1 kOhms" "RES 0603_1608" 93.795,116.617 r90 top (schematic designator BIN_R1)
BIN_R2_U_OR_GATE_22 "1 kOhms" "RES 0603_1608" 51.926,86.548 r90 top (schematic designator BIN_R2)
BIN_R2_U_OR_GATE_30 "1 kOhms" "RES 0603_1608" 67.31,116.84 r90 top (schematic designator BIN_R2)
BIN_R2_U_OR_GATE_31 "1 kOhms" "RES 0603_1608" 71.754,101.026 r90 top (schematic designator BIN_R2)
BIN_R2_U_OR_GATE_32 "1 kOhms" "RES 0603_1608" 65.954,85.278 r90 top (schematic designator BIN_R2)
BIN_R2_U_OR_GATE_41 "1 kOhms" "RES 0603_1608" 38.1,85.005 r90 top (schematic designator BIN_R2)
BIN_R3_U_XOR_GATE_00 "1 kOhms" "RES 0603_1608" 27.91,116.399 r90 top (schematic designator BIN_R3)
BIN_R3_U_XOR_GATE_20 "1 kOhms" "RES 0603_1608" 47.512,116.454 r90 top (schematic designator BIN_R3)
BIN_R3_U_XOR_GATE_21 "1 kOhms" "RES 0603_1608" 52.07,101.915 r90 top (schematic designator BIN_R3)
BIN_R4_U_NAND_GATE_10 "1 kOhms" "RES 0603_1608" 40.02,100.883 r90 top (schematic designator BIN_R4)
BIN_R4_U_NAND_GATE_40 "1 kOhms" "RES 0603_1608" 81.555,116.841 r90 top (schematic designator BIN_R4)
BIN_RD1_U_AND_GATE_42 "330 Ohms" "RES 0603_1608" 80.075,82.392 r270 top (schematic designator BIN_RD1)
BIN_RD1_U_AND_GATE_43 "330 Ohms" "RES 0603_1608" 24.627,88.153 r270 top (schematic designator BIN_RD1)
BIN_RD1_U_AND_GATE_44 "330 Ohms" "RES 0603_1608" 85.791,98.146 r270 top (schematic designator BIN_RD1)
BIN_RD1_U_AND_GATE_45 "330 Ohms" "RES 0603_1608" 93.795,113.757 r270 top (schematic designator BIN_RD1)
BIN_RD2_U_OR_GATE_22 "330 Ohms" "RES 0603_1608" 51.926,83.52 r270 top (schematic designator BIN_RD2)
BIN_RD2_U_OR_GATE_30 "330 Ohms" "RES 0603_1608" 67.31,113.812 r270 top (schematic designator BIN_RD2)
BIN_RD2_U_OR_GATE_31 "330 Ohms" "RES 0603_1608" 71.754,97.998 r270 top (schematic designator BIN_RD2)
BIN_RD2_U_OR_GATE_32 "330 Ohms" "RES 0603_1608" 65.954,82.25 r270 top (schematic designator BIN_RD2)
BIN_RD2_U_OR_GATE_41 "330 Ohms" "RES 0603_1608" 38.1,81.977 r270 top (schematic designator BIN_RD2)
BIN_RD3_U_XOR_GATE_00 "330 Ohms" "RES 0603_1608" 27.91,113.351 r270 top (schematic designator BIN_RD3)
BIN_RD3_U_XOR_GATE_20 "330 Ohms" "RES 0603_1608" 47.512,113.406 r270 top (schematic designator BIN_RD3)
BIN_RD3_U_XOR_GATE_21 "330 Ohms" "RES 0603_1608" 52.07,98.867 r270 top (schematic designator BIN_RD3)
BIN_RD4_U_NAND_GATE_10 "330 Ohms" "RES 0603_1608" 40.02,97.932 r270 top (schematic designator BIN_RD4)
BIN_RD4_U_NAND_GATE_40 "330 Ohms" "RES 0603_1608" 81.555,113.89 r270 top (schematic designator BIN_RD4)
IN1 "2.54mm_TH_1x9_pin_header" 2.54mm_TH_1x9_pin_header 20.32,104.14 r270 bottom
OUT1 "2.54mm_TH_1x9_pin_header" 2.54mm_TH_1x9_pin_header 124.46,104.14 r270 bottom
Q1_U_AND_GATE_42 "#NAME?" "MCCSEMI SOT-23-3" 86.39,87.487 r0 top (schematic designator Q1)
Q1_U_AND_GATE_43 "#NAME?" "MCCSEMI SOT-23-3" 30.942,93.248 r0 top (schematic designator Q1)
Q1_U_AND_GATE_44 "#NAME?" "MCCSEMI SOT-23-3" 92.106,103.241 r0 top (schematic designator Q1)
Q1_U_AND_GATE_45 "#NAME?" "MCCSEMI SOT-23-3" 100.11,118.852 r0 top (schematic designator Q1)
Q2_U_AND_GATE_42 "#NAME?" "MCCSEMI SOT-23-3" 86.502,93.202 r90 top (schematic designator Q2)
Q2_U_AND_GATE_43 "#NAME?" "MCCSEMI SOT-23-3" 31.054,98.963 r90 top (schematic designator Q2)
Q2_U_AND_GATE_44 "#NAME?" "MCCSEMI SOT-23-3" 92.218,108.956 r90 top (schematic designator Q2)
Q2_U_AND_GATE_45 "#NAME?" "MCCSEMI SOT-23-3" 100.222,124.567 r90 top (schematic designator Q2)
Q3_U_AND_GATE_42 "#NAME?" "MCCSEMI SOT-23-3" 86.39,83.52 r0 top (schematic designator Q3)
Q3_U_AND_GATE_43 "#NAME?" "MCCSEMI SOT-23-3" 30.942,89.281 r0 top (schematic designator Q3)
Q3_U_AND_GATE_44 "#NAME?" "MCCSEMI SOT-23-3" 92.106,99.274 r0 top (schematic designator Q3)
Q3_U_AND_GATE_45 "#NAME?" "MCCSEMI SOT-23-3" 100.11,114.885 r0 top (schematic designator Q3)
Q4_U_OR_GATE_22 "#NAME?" "MCCSEMI SOT-23-3" 58.164,94.325 r90 top (schematic designator Q4)
Q4_U_OR_GATE_30 "#NAME?" "MCCSEMI SOT-23-3" 73.548,124.617 r90 top (schematic designator Q4)
Q4_U_OR_GATE_31 "#NAME?" "MCCSEMI SOT-23-3" 77.992,108.803 r90 top (schematic designator Q4)
Q4_U_OR_GATE_32 "#NAME?" "MCCSEMI SOT-23-3" 72.192,93.055 r90 top (schematic designator Q4)
Q4_U_OR_GATE_41 "#NAME?" "MCCSEMI SOT-23-3" 44.338,92.782 r90 top (schematic designator Q4)
Q5_U_OR_GATE_22 "#NAME?" "MCCSEMI SOT-23-3" 58.276,88.326 r0 top (schematic designator Q5)
Q5_U_OR_GATE_30 "#NAME?" "MCCSEMI SOT-23-3" 73.66,118.618 r0 top (schematic designator Q5)
Q5_U_OR_GATE_31 "#NAME?" "MCCSEMI SOT-23-3" 78.104,102.804 r0 top (schematic designator Q5)
Q5_U_OR_GATE_32 "#NAME?" "MCCSEMI SOT-23-3" 72.304,87.056 r0 top (schematic designator Q5)
Q5_U_OR_GATE_41 "#NAME?" "MCCSEMI SOT-23-3" 44.45,86.783 r0 top (schematic designator Q5)
Q6_U_OR_GATE_22 "#NAME?" "MCCSEMI SOT-23-3" 58.273,84.262 r0 top (schematic designator Q6)
Q6_U_OR_GATE_30 "#NAME?" "MCCSEMI SOT-23-3" 73.657,114.554 r0 top (schematic designator Q6)
Q6_U_OR_GATE_31 "#NAME?" "MCCSEMI SOT-23-3" 78.101,98.74 r0 top (schematic designator Q6)
Q6_U_OR_GATE_32 "#NAME?" "MCCSEMI SOT-23-3" 72.301,82.992 r0 top (schematic designator Q6)
Q6_U_OR_GATE_41 "#NAME?" "MCCSEMI SOT-23-3" 44.447,82.719 r0 top (schematic designator Q6)
Q7_U_NOT_GATE_01 "#NAME?" "MCCSEMI SOT-23-3" 30.399,109.346 r0 top (schematic designator Q7)
Q7_U_NOT_GATE_50 "#NAME?" "MCCSEMI SOT-23-3" 109.759,119.76 r0 top (schematic designator Q7)
Q7_U_NOT_GATE_51 "#NAME?" "MCCSEMI SOT-23-3" 101.885,109.168 r0 top (schematic designator Q7)
Q7_U_NOT_GATE_52 "#NAME?" "MCCSEMI SOT-23-3" 101.773,98.699 r0 top (schematic designator Q7)
Q7_U_NOT_GATE_53 "#NAME?" "MCCSEMI SOT-23-3" 96.043,88.302 r0 top (schematic designator Q7)
Q7_U_NOT_GATE_54 "#NAME?" "MCCSEMI SOT-23-3" 107.615,88.264 r0 top (schematic designator Q7)
Q7_U_NOT_GATE_55 "#NAME?" "MCCSEMI SOT-23-3" 113.457,98.678 r0 top (schematic designator Q7)
Q7_U_NOT_GATE_56 "#NAME?" "MCCSEMI SOT-23-3" 113.457,109.153 r0 top (schematic designator Q7)
Q8_U_XOR_GATE_00 "#NAME?" "MCCSEMI SOT-23-3" 36.292,123.511 r0 top (schematic designator Q8)
Q8_U_XOR_GATE_20 "#NAME?" "MCCSEMI SOT-23-3" 55.894,123.566 r0 top (schematic designator Q8)
Q8_U_XOR_GATE_21 "#NAME?" "MCCSEMI SOT-23-3" 60.452,109.027 r0 top (schematic designator Q8)
Q9_U_XOR_GATE_00 "#NAME?" "MCCSEMI SOT-23-3" 40.356,119.955 r0 top (schematic designator Q9)
Q9_U_XOR_GATE_20 "#NAME?" "MCCSEMI SOT-23-3" 59.958,120.01 r0 top (schematic designator Q9)
Q9_U_XOR_GATE_21 "#NAME?" "MCCSEMI SOT-23-3" 64.516,105.471 r0 top (schematic designator Q9)
Q10_U_XOR_GATE_00 "#NAME?" "MCCSEMI SOT-23-3" 36.038,117.923 r0 top (schematic designator Q10)
Q10_U_XOR_GATE_20 "#NAME?" "MCCSEMI SOT-23-3" 55.64,117.978 r0 top (schematic designator Q10)
Q10_U_XOR_GATE_21 "#NAME?" "MCCSEMI SOT-23-3" 60.198,103.439 r0 top (schematic designator Q10)
Q11_U_XOR_GATE_00 "#NAME?" "MCCSEMI SOT-23-3" 39.848,114.113 r90 top (schematic designator Q11)
Q11_U_XOR_GATE_20 "#NAME?" "MCCSEMI SOT-23-3" 59.45,114.168 r90 top (schematic designator Q11)
Q11_U_XOR_GATE_21 "#NAME?" "MCCSEMI SOT-23-3" 64.008,99.629 r90 top (schematic designator Q11)
Q12_U_XOR_GATE_00 "#NAME?" "MCCSEMI SOT-23-3" 34.26,113.859 r90 top (schematic designator Q12)
Q12_U_XOR_GATE_20 "#NAME?" "MCCSEMI SOT-23-3" 53.862,113.914 r90 top (schematic designator Q12)
Q12_U_XOR_GATE_21 "#NAME?" "MCCSEMI SOT-23-3" 58.42,99.375 r90 top (schematic designator Q12)
Q13_U_NAND_GATE_10 "#NAME?" "MCCSEMI SOT-23-3" 46.349,107.218 r90 top (schematic designator Q13)
Q13_U_NAND_GATE_40 "#NAME?" "MCCSEMI SOT-23-3" 87.884,123.176 r90 top (schematic designator Q13)
Q14_U_NAND_GATE_10 "#NAME?" "MCCSEMI SOT-23-3" 46.349,103.139 r90 top (schematic designator Q14)
Q14_U_NAND_GATE_40 "#NAME?" "MCCSEMI SOT-23-3" 87.884,119.097 r90 top (schematic designator Q14)
R1_U_AND_GATE_42 "1 kOhms" "RES 0603_1608" 86.248,90.378 r180 top (schematic designator R1)
R1_U_AND_GATE_43 "1 kOhms" "RES 0603_1608" 30.8,96.139 r180 top (schematic designator R1)
R1_U_AND_GATE_44 "1 kOhms" "RES 0603_1608" 91.964,106.132 r180 top (schematic designator R1)
R1_U_AND_GATE_45 "1 kOhms" "RES 0603_1608" 99.968,121.743 r180 top (schematic designator R1)
R2_U_AND_GATE_42 "1 kOhms" "RES 0603_1608" 82.692,89.235 r0 top (schematic designator R2)
R2_U_AND_GATE_43 "1 kOhms" "RES 0603_1608" 27.244,94.996 r0 top (schematic designator R2)
R2_U_AND_GATE_44 "1 kOhms" "RES 0603_1608" 88.408,104.989 r0 top (schematic designator R2)
R2_U_AND_GATE_45 "1 kOhms" "RES 0603_1608" 96.412,120.6 r0 top (schematic designator R2)
R3_U_AND_GATE_42 "1 kOhms" "RES 0603_1608" 82.692,86.979 r0 top (schematic designator R3)
R3_U_AND_GATE_43 "1 kOhms" "RES 0603_1608" 27.244,92.74 r0 top (schematic designator R3)
R3_U_AND_GATE_44 "1 kOhms" "RES 0603_1608" 88.408,102.733 r0 top (schematic designator R3)
R3_U_AND_GATE_45 "1 kOhms" "RES 0603_1608" 96.412,118.344 r0 top (schematic designator R3)
R4 "220 Ohms" "RES 0603_1608" 119.38,118.11 r0 top
R5 "220 Ohms" "RES 0603_1608" 119.38,116.205 r0 top
R6 "220 Ohms" "RES 0603_1608" 119.38,114.3 r0 top
R7 "220 Ohms" "RES 0603_1608" 119.38,112.395 r0 top
R8 "220 Ohms" "RES 0603_1608" 117.475,89.535 r0 top
R9 "220 Ohms" "RES 0603_1608" 117.475,87.63 r0 top
R10 "220 Ohms" "RES 0603_1608" 117.475,85.725 r0 top
R11_U_OR_GATE_22 "1 kOhms" "RES 0603_1608" 54.196,90.165 r0 top (schematic designator R11)
R11_U_OR_GATE_30 "1 kOhms" "RES 0603_1608" 69.58,120.457 r0 top (schematic designator R11)
R11_U_OR_GATE_31 "1 kOhms" "RES 0603_1608" 74.024,104.643 r0 top (schematic designator R11)
R11_U_OR_GATE_32 "1 kOhms" "RES 0603_1608" 68.224,88.895 r0 top (schematic designator R11)
R11_U_OR_GATE_41 "1 kOhms" "RES 0603_1608" 40.37,88.622 r0 top (schematic designator R11)
R12_U_OR_GATE_22 "1 kOhms" "RES 0603_1608" 58.006,91.435 r0 top (schematic designator R12)
R12_U_OR_GATE_30 "1 kOhms" "RES 0603_1608" 73.39,121.727 r0 top (schematic designator R12)
R12_U_OR_GATE_31 "1 kOhms" "RES 0603_1608" 77.834,105.913 r0 top (schematic designator R12)
R12_U_OR_GATE_32 "1 kOhms" "RES 0603_1608" 72.034,90.165 r0 top (schematic designator R12)
R12_U_OR_GATE_41 "1 kOhms" "RES 0603_1608" 44.18,89.892 r0 top (schematic designator R12)
R13_U_OR_GATE_22 "1 kOhms" "RES 0603_1608" 54.196,88.26 r0 top (schematic designator R13)
R13_U_OR_GATE_30 "1 kOhms" "RES 0603_1608" 69.58,118.552 r0 top (schematic designator R13)
R13_U_OR_GATE_31 "1 kOhms" "RES 0603_1608" 74.024,102.738 r0 top (schematic designator R13)
R13_U_OR_GATE_32 "1 kOhms" "RES 0603_1608" 68.224,86.99 r0 top (schematic designator R13)
R13_U_OR_GATE_41 "1 kOhms" "RES 0603_1608" 40.37,86.717 r0 top (schematic designator R13)
R14_U_NOT_GATE_01 "1 kOhms" "RES 0603_1608" 27.81,109.616 r90 top (schematic designator R14)
R14_U_NOT_GATE_50 "1 kOhms" "RES 0603_1608" 107.17,120.03 r90 top (schematic designator R14)
R14_U_NOT_GATE_51 "1 kOhms" "RES 0603_1608" 99.296,109.438 r90 top (schematic designator R14)
R14_U_NOT_GATE_52 "1 kOhms" "RES 0603_1608" 99.184,98.969 r90 top (schematic designator R14)
R14_U_NOT_GATE_53 "1 kOhms" "RES 0603_1608" 93.454,88.572 r90 top (schematic designator R14)
R14_U_NOT_GATE_54 "1 kOhms" "RES 0603_1608" 105.026,88.534 r90 top (schematic designator R14)
R14_U_NOT_GATE_55 "1 kOhms" "RES 0603_1608" 110.868,98.948 r90 top (schematic designator R14)
R14_U_NOT_GATE_56 "1 kOhms" "RES 0603_1608" 110.868,109.423 r90 top (schematic designator R14)
R15_U_XOR_GATE_00 "1 kOhms" "RES 0603_1608" 37.054,114.367 r90 top (schematic designator R15)
R15_U_XOR_GATE_20 "1 kOhms" "RES 0603_1608" 56.656,114.422 r90 top (schematic designator R15)
R15_U_XOR_GATE_21 "1 kOhms" "RES 0603_1608" 61.214,99.883 r90 top (schematic designator R15)
R16_U_XOR_GATE_00 "220 Ohms" "RES 0603_1608" 42.642,114.113 r270 top (schematic designator R16)
R16_U_XOR_GATE_20 "220 Ohms" "RES 0603_1608" 62.244,114.168 r270 top (schematic designator R16)
R16_U_XOR_GATE_21 "220 Ohms" "RES 0603_1608" 66.802,99.629 r270 top (schematic designator R16)
R17_U_XOR_GATE_00 "1 kOhms" "RES 0603_1608" 33.498,123.511 r90 top (schematic designator R17)
R17_U_XOR_GATE_20 "1 kOhms" "RES 0603_1608" 53.1,123.566 r90 top (schematic designator R17)
R17_U_XOR_GATE_21 "1 kOhms" "RES 0603_1608" 57.658,109.027 r90 top (schematic designator R17)
R18_U_XOR_GATE_00 "1 kOhms" "RES 0603_1608" 37.054,120.717 r0 top (schematic designator R18)
R18_U_XOR_GATE_20 "1 kOhms" "RES 0603_1608" 56.656,120.772 r0 top (schematic designator R18)
R18_U_XOR_GATE_21 "1 kOhms" "RES 0603_1608" 61.214,106.233 r0 top (schematic designator R18)
R19_U_XOR_GATE_00 "1 kOhms" "RES 0603_1608" 34.006,120.717 r180 top (schematic designator R19)
R19_U_XOR_GATE_20 "1 kOhms" "RES 0603_1608" 53.608,120.772 r180 top (schematic designator R19)
R19_U_XOR_GATE_21 "1 kOhms" "RES 0603_1608" 58.166,106.233 r180 top (schematic designator R19)
R20_U_XOR_GATE_00 "1 kOhms" "RES 0603_1608" 39.34,117.161 r0 top (schematic designator R20)
R20_U_XOR_GATE_20 "1 kOhms" "RES 0603_1608" 58.942,117.216 r0 top (schematic designator R20)
R20_U_XOR_GATE_21 "1 kOhms" "RES 0603_1608" 63.5,102.677 r0 top (schematic designator R20)
R21_U_XOR_GATE_00 "1 kOhms" "RES 0603_1608" 30.704,119.193 r0 top (schematic designator R21)
R21_U_XOR_GATE_20 "1 kOhms" "RES 0603_1608" 50.306,119.248 r0 top (schematic designator R21)
R21_U_XOR_GATE_21 "1 kOhms" "RES 0603_1608" 54.864,104.709 r0 top (schematic designator R21)
R22_U_XOR_GATE_00 "1 kOhms" "RES 0603_1608" 33.244,117.161 r270 top (schematic designator R22)
R22_U_XOR_GATE_20 "1 kOhms" "RES 0603_1608" 52.846,117.216 r270 top (schematic designator R22)
R22_U_XOR_GATE_21 "1 kOhms" "RES 0603_1608" 57.404,102.677 r270 top (schematic designator R22)
R23_U_NAND_GATE_10 "1 kOhms" "RES 0603_1608" 42.539,104.932 r0 top (schematic designator R23)
R23_U_NAND_GATE_40 "1 kOhms" "RES 0603_1608" 84.074,120.89 r0 top (schematic designator R23)
R24_U_NAND_GATE_10 "1 kOhms" "RES 0603_1608" 42.539,102.649 r0 top (schematic designator R24)
R24_U_NAND_GATE_40 "1 kOhms" "RES 0603_1608" 84.074,118.607 r0 top (schematic designator R24)
RO1_U_AND_GATE_42 "220 Ohms" "RES 0603_1608" 89.312,92.567 r270 top (schematic designator RO1)
RO1_U_AND_GATE_43 "220 Ohms" "RES 0603_1608" 33.864,98.328 r270 top (schematic designator RO1)
RO1_U_AND_GATE_44 "220 Ohms" "RES 0603_1608" 95.028,108.321 r270 top (schematic designator RO1)
RO1_U_AND_GATE_45 "220 Ohms" "RES 0603_1608" 103.032,123.932 r270 top (schematic designator RO1)
RO2_U_OR_GATE_22 "220 Ohms" "RES 0603_1608" 60.944,91.435 r180 top (schematic designator RO2)
RO2_U_OR_GATE_30 "220 Ohms" "RES 0603_1608" 76.328,121.727 r180 top (schematic designator RO2)
RO2_U_OR_GATE_31 "220 Ohms" "RES 0603_1608" 80.772,105.913 r180 top (schematic designator RO2)
RO2_U_OR_GATE_32 "220 Ohms" "RES 0603_1608" 74.972,90.165 r180 top (schematic designator RO2)
RO2_U_OR_GATE_41 "220 Ohms" "RES 0603_1608" 47.118,89.892 r180 top (schematic designator RO2)
RO3_U_NOT_GATE_01 "220 Ohms" "RES 0603_1608" 33.02,109.616 r270 top (schematic designator RO3)
RO3_U_NOT_GATE_50 "220 Ohms" "RES 0603_1608" 112.38,120.03 r270 top (schematic designator RO3)
RO3_U_NOT_GATE_51 "220 Ohms" "RES 0603_1608" 104.506,109.438 r270 top (schematic designator RO3)
RO3_U_NOT_GATE_52 "220 Ohms" "RES 0603_1608" 104.394,98.969 r270 top (schematic designator RO3)
RO3_U_NOT_GATE_53 "220 Ohms" "RES 0603_1608" 98.664,88.572 r270 top (schematic designator RO3)
RO3_U_NOT_GATE_54 "220 Ohms" "RES 0603_1608" 110.236,88.534 r270 top (schematic designator RO3)
RO3_U_NOT_GATE_55 "220 Ohms" "RES 0603_1608" 116.078,98.948 r270 top (schematic designator RO3)
RO3_U_NOT_GATE_56 "220 Ohms" "RES 0603_1608" 116.078,109.423 r270 top (schematic designator RO3)
RO4_U_NAND_GATE_10 "220 Ohms" "RES 0603_1608" 46.095,110.073 r0 top (schematic designator RO4)
RO4_U_NAND_GATE_40 "220 Ohms" "RES 0603_1608" 87.63,126.031 r0 top (schematic designator RO4)
Y_D1_U_AND_GATE_42 "Red" "LED 0603_1608 RED" 90.058,84.632 r0 top (schematic designator Y_D1)
Y_D1_U_AND_GATE_43 "Red" "LED 0603_1608 RED" 34.61,90.393 r0 top (schematic designator Y_D1)
Y_D1_U_AND_GATE_44 "Red" "LED 0603_1608 RED" 95.774,100.386 r0 top (schematic designator Y_D1)
Y_D1_U_AND_GATE_45 "Red" "LED 0603_1608 RED" 103.778,115.997 r0 top (schematic designator Y_D1)
Y_D2_U_OR_GATE_22 "Red" "LED 0603_1608 RED" 61.801,93.261 r0 top (schematic designator Y_D2)
Y_D2_U_OR_GATE_30 "Red" "LED 0603_1608 RED" 77.185,123.553 r0 top (schematic designator Y_D2)
Y_D2_U_OR_GATE_31 "Red" "LED 0603_1608 RED" 81.629,107.739 r0 top (schematic designator Y_D2)
Y_D2_U_OR_GATE_32 "Red" "LED 0603_1608 RED" 75.829,91.991 r0 top (schematic designator Y_D2)
Y_D2_U_OR_GATE_41 "Red" "LED 0603_1608 RED" 47.975,91.718 r0 top (schematic designator Y_D2)
Y_D3_U_NOT_GATE_01 "Red" "LED 0603_1608 RED" 36.83,105.507 r90 top (schematic designator Y_D3)
Y_D3_U_NOT_GATE_50 "Red" "LED 0603_1608 RED" 116.19,115.921 r90 top (schematic designator Y_D3)
Y_D3_U_NOT_GATE_51 "Red" "LED 0603_1608 RED" 108.316,105.329 r90 top (schematic designator Y_D3)
Y_D3_U_NOT_GATE_52 "Red" "LED 0603_1608 RED" 108.204,94.86 r90 top (schematic designator Y_D3)
Y_D3_U_NOT_GATE_53 "Red" "LED 0603_1608 RED" 102.474,84.463 r90 top (schematic designator Y_D3)
Y_D3_U_NOT_GATE_54 "Red" "LED 0603_1608 RED" 114.046,84.425 r90 top (schematic designator Y_D3)
Y_D3_U_NOT_GATE_55 "Red" "LED 0603_1608 RED" 119.888,94.839 r90 top (schematic designator Y_D3)
Y_D3_U_NOT_GATE_56 "Red" "LED 0603_1608 RED" 119.888,105.314 r90 top (schematic designator Y_D3)
Y_D4_U_XOR_GATE_00 "Red" "LED 0603_1608 RED" 42.896,123.511 r90 top (schematic designator Y_D4)
Y_D4_U_XOR_GATE_20 "Red" "LED 0603_1608 RED" 62.498,123.566 r90 top (schematic designator Y_D4)
Y_D4_U_XOR_GATE_21 "Red" "LED 0603_1608 RED" 67.056,109.027 r90 top (schematic designator Y_D4)
Y_D5_U_NAND_GATE_10 "Red" "LED 0603_1608 RED" 49.143,99.598 r270 top (schematic designator Y_D5)
Y_D5_U_NAND_GATE_40 "Red" "LED 0603_1608 RED" 90.678,115.556 r270 top (schematic designator Y_D5)
Y_Q1_U_AND_GATE_42 "#NAME?" "MCCSEMI SOT-23-3" 90.058,87.233 r0 top (schematic designator Y_Q1)
Y_Q1_U_AND_GATE_43 "#NAME?" "MCCSEMI SOT-23-3" 34.61,92.994 r0 top (schematic designator Y_Q1)
Y_Q1_U_AND_GATE_44 "#NAME?" "MCCSEMI SOT-23-3" 95.774,102.987 r0 top (schematic designator Y_Q1)
Y_Q1_U_AND_GATE_45 "#NAME?" "MCCSEMI SOT-23-3" 103.778,118.598 r0 top (schematic designator Y_Q1)
Y_Q2_U_OR_GATE_22 "#NAME?" "MCCSEMI SOT-23-3" 61.944,84.516 r0 top (schematic designator Y_Q2)
Y_Q2_U_OR_GATE_30 "#NAME?" "MCCSEMI SOT-23-3" 77.328,114.808 r0 top (schematic designator Y_Q2)
Y_Q2_U_OR_GATE_31 "#NAME?" "MCCSEMI SOT-23-3" 81.772,98.994 r0 top (schematic designator Y_Q2)
Y_Q2_U_OR_GATE_32 "#NAME?" "MCCSEMI SOT-23-3" 75.972,83.246 r0 top (schematic designator Y_Q2)
Y_Q2_U_OR_GATE_41 "#NAME?" "MCCSEMI SOT-23-3" 48.118,82.973 r0 top (schematic designator Y_Q2)
Y_Q3_U_NOT_GATE_01 "#NAME?" "MCCSEMI SOT-23-3" 34.135,105.41 r0 top (schematic designator Y_Q3)
Y_Q3_U_NOT_GATE_50 "#NAME?" "MCCSEMI SOT-23-3" 113.495,115.824 r0 top (schematic designator Y_Q3)
Y_Q3_U_NOT_GATE_51 "#NAME?" "MCCSEMI SOT-23-3" 105.621,105.232 r0 top (schematic designator Y_Q3)
Y_Q3_U_NOT_GATE_52 "#NAME?" "MCCSEMI SOT-23-3" 105.509,94.763 r0 top (schematic designator Y_Q3)
Y_Q3_U_NOT_GATE_53 "#NAME?" "MCCSEMI SOT-23-3" 99.779,84.366 r0 top (schematic designator Y_Q3)
Y_Q3_U_NOT_GATE_54 "#NAME?" "MCCSEMI SOT-23-3" 111.351,84.328 r0 top (schematic designator Y_Q3)
Y_Q3_U_NOT_GATE_55 "#NAME?" "MCCSEMI SOT-23-3" 117.193,94.742 r0 top (schematic designator Y_Q3)
Y_Q3_U_NOT_GATE_56 "#NAME?" "MCCSEMI SOT-23-3" 117.193,105.217 r0 top (schematic designator Y_Q3)
Y_Q4_U_XOR_GATE_00 "#NAME?" "MCCSEMI SOT-23-3" 40.102,123.511 r90 top (schematic designator Y_Q4)
Y_Q4_U_XOR_GATE_20 "#NAME?" "MCCSEMI SOT-23-3" 59.704,123.566 r90 top (schematic designator Y_Q4)
Y_Q4_U_XOR_GATE_21 "#NAME?" "MCCSEMI SOT-23-3" 64.262,109.027 r90 top (schematic designator Y_Q4)
Y_Q5_U_NAND_GATE_10 "#NAME?" "MCCSEMI SOT-23-3" 46.349,99.583 r90 top (schematic designator Y_Q5)
Y_Q5_U_NAND_GATE_40 "#NAME?" "MCCSEMI SOT-23-3" 87.884,115.541 r90 top (schematic designator Y_Q5)
Y_R1_U_AND_GATE_42 "1 kOhms" "RES 0603_1608" 89.82,90.027 r0 top (schematic designator Y_R1)
Y_R1_U_AND_GATE_43 "1 kOhms" "RES 0603_1608" 34.372,95.788 r0 top (schematic designator Y_R1)
Y_R1_U_AND_GATE_44 "1 kOhms" "RES 0603_1608" 95.536,105.781 r0 top (schematic designator Y_R1)
Y_R1_U_AND_GATE_45 "1 kOhms" "RES 0603_1608" 103.54,121.392 r0 top (schematic designator Y_R1)
Y_R2_U_OR_GATE_22 "1 kOhms" "RES 0603_1608" 61.216,87.96 r90 top (schematic designator Y_R2)
Y_R2_U_OR_GATE_30 "1 kOhms" "RES 0603_1608" 76.6,118.252 r90 top (schematic designator Y_R2)
Y_R2_U_OR_GATE_31 "1 kOhms" "RES 0603_1608" 81.044,102.438 r90 top (schematic designator Y_R2)
Y_R2_U_OR_GATE_32 "1 kOhms" "RES 0603_1608" 75.244,86.69 r90 top (schematic designator Y_R2)
Y_R2_U_OR_GATE_41 "1 kOhms" "RES 0603_1608" 47.39,86.417 r90 top (schematic designator Y_R2)
Y_R3_U_NOT_GATE_01 "1 kOhms" "RES 0603_1608" 34.798,109.574 r90 top (schematic designator Y_R3)
Y_R3_U_NOT_GATE_50 "1 kOhms" "RES 0603_1608" 114.158,119.988 r90 top (schematic designator Y_R3)
Y_R3_U_NOT_GATE_51 "1 kOhms" "RES 0603_1608" 106.284,109.396 r90 top (schematic designator Y_R3)
Y_R3_U_NOT_GATE_52 "1 kOhms" "RES 0603_1608" 106.172,98.927 r90 top (schematic designator Y_R3)
Y_R3_U_NOT_GATE_53 "1 kOhms" "RES 0603_1608" 100.442,88.53 r90 top (schematic designator Y_R3)
Y_R3_U_NOT_GATE_54 "1 kOhms" "RES 0603_1608" 112.014,88.492 r90 top (schematic designator Y_R3)
Y_R3_U_NOT_GATE_55 "1 kOhms" "RES 0603_1608" 117.856,98.906 r90 top (schematic designator Y_R3)
Y_R3_U_NOT_GATE_56 "1 kOhms" "RES 0603_1608" 117.856,109.381 r90 top (schematic designator Y_R3)
Y_R4_U_XOR_GATE_00 "1 kOhms" "RES 0603_1608" 43.15,120.209 r270 top (schematic designator Y_R4)
Y_R4_U_XOR_GATE_20 "1 kOhms" "RES 0603_1608" 62.752,120.264 r270 top (schematic designator Y_R4)
Y_R4_U_XOR_GATE_21 "1 kOhms" "RES 0603_1608" 67.31,105.725 r270 top (schematic designator Y_R4)
Y_R5_U_NAND_GATE_10 "1 kOhms" "RES 0603_1608" 46.228,96.901 r0 top (schematic designator Y_R5)
Y_R5_U_NAND_GATE_40 "1 kOhms" "RES 0603_1608" 87.763,112.859 r0 top (schematic designator Y_R5)
Y_RD1_U_AND_GATE_42 "330 Ohms" "RES 0603_1608" 89.804,82.9 r180 top (schematic designator Y_RD1)
Y_RD1_U_AND_GATE_43 "330 Ohms" "RES 0603_1608" 34.356,88.661 r180 top (schematic designator Y_RD1)
Y_RD1_U_AND_GATE_44 "330 Ohms" "RES 0603_1608" 95.52,98.654 r180 top (schematic designator Y_RD1)
Y_RD1_U_AND_GATE_45 "330 Ohms" "RES 0603_1608" 103.524,114.265 r180 top (schematic designator Y_RD1)
Y_RD2_U_OR_GATE_22 "330 Ohms" "RES 0603_1608" 61.594,95.184 r180 top (schematic designator Y_RD2)
Y_RD2_U_OR_GATE_30 "330 Ohms" "RES 0603_1608" 76.978,125.476 r180 top (schematic designator Y_RD2)
Y_RD2_U_OR_GATE_31 "330 Ohms" "RES 0603_1608" 81.422,109.662 r180 top (schematic designator Y_RD2)
Y_RD2_U_OR_GATE_32 "330 Ohms" "RES 0603_1608" 75.622,93.914 r180 top (schematic designator Y_RD2)
Y_RD2_U_OR_GATE_41 "330 Ohms" "RES 0603_1608" 47.768,93.641 r180 top (schematic designator Y_RD2)